# Altium PCB AIMLAB_TESTSTATION_ADC_V1.PcbDoc (part 1 of 4)
Units mm, origin at the board's own origin, x right, y up, seen from the top; angles counter-clockwise.
Board outline 175.7 x 83.5 mm, 6 copper layers (Top Layer, MidLayer1, MidLayer2, MidLayer3, MidLayer4, Bottom Layer), stack 1.507 mm thick; 326 components, 348 nets, 1330 pads, 153 vias.
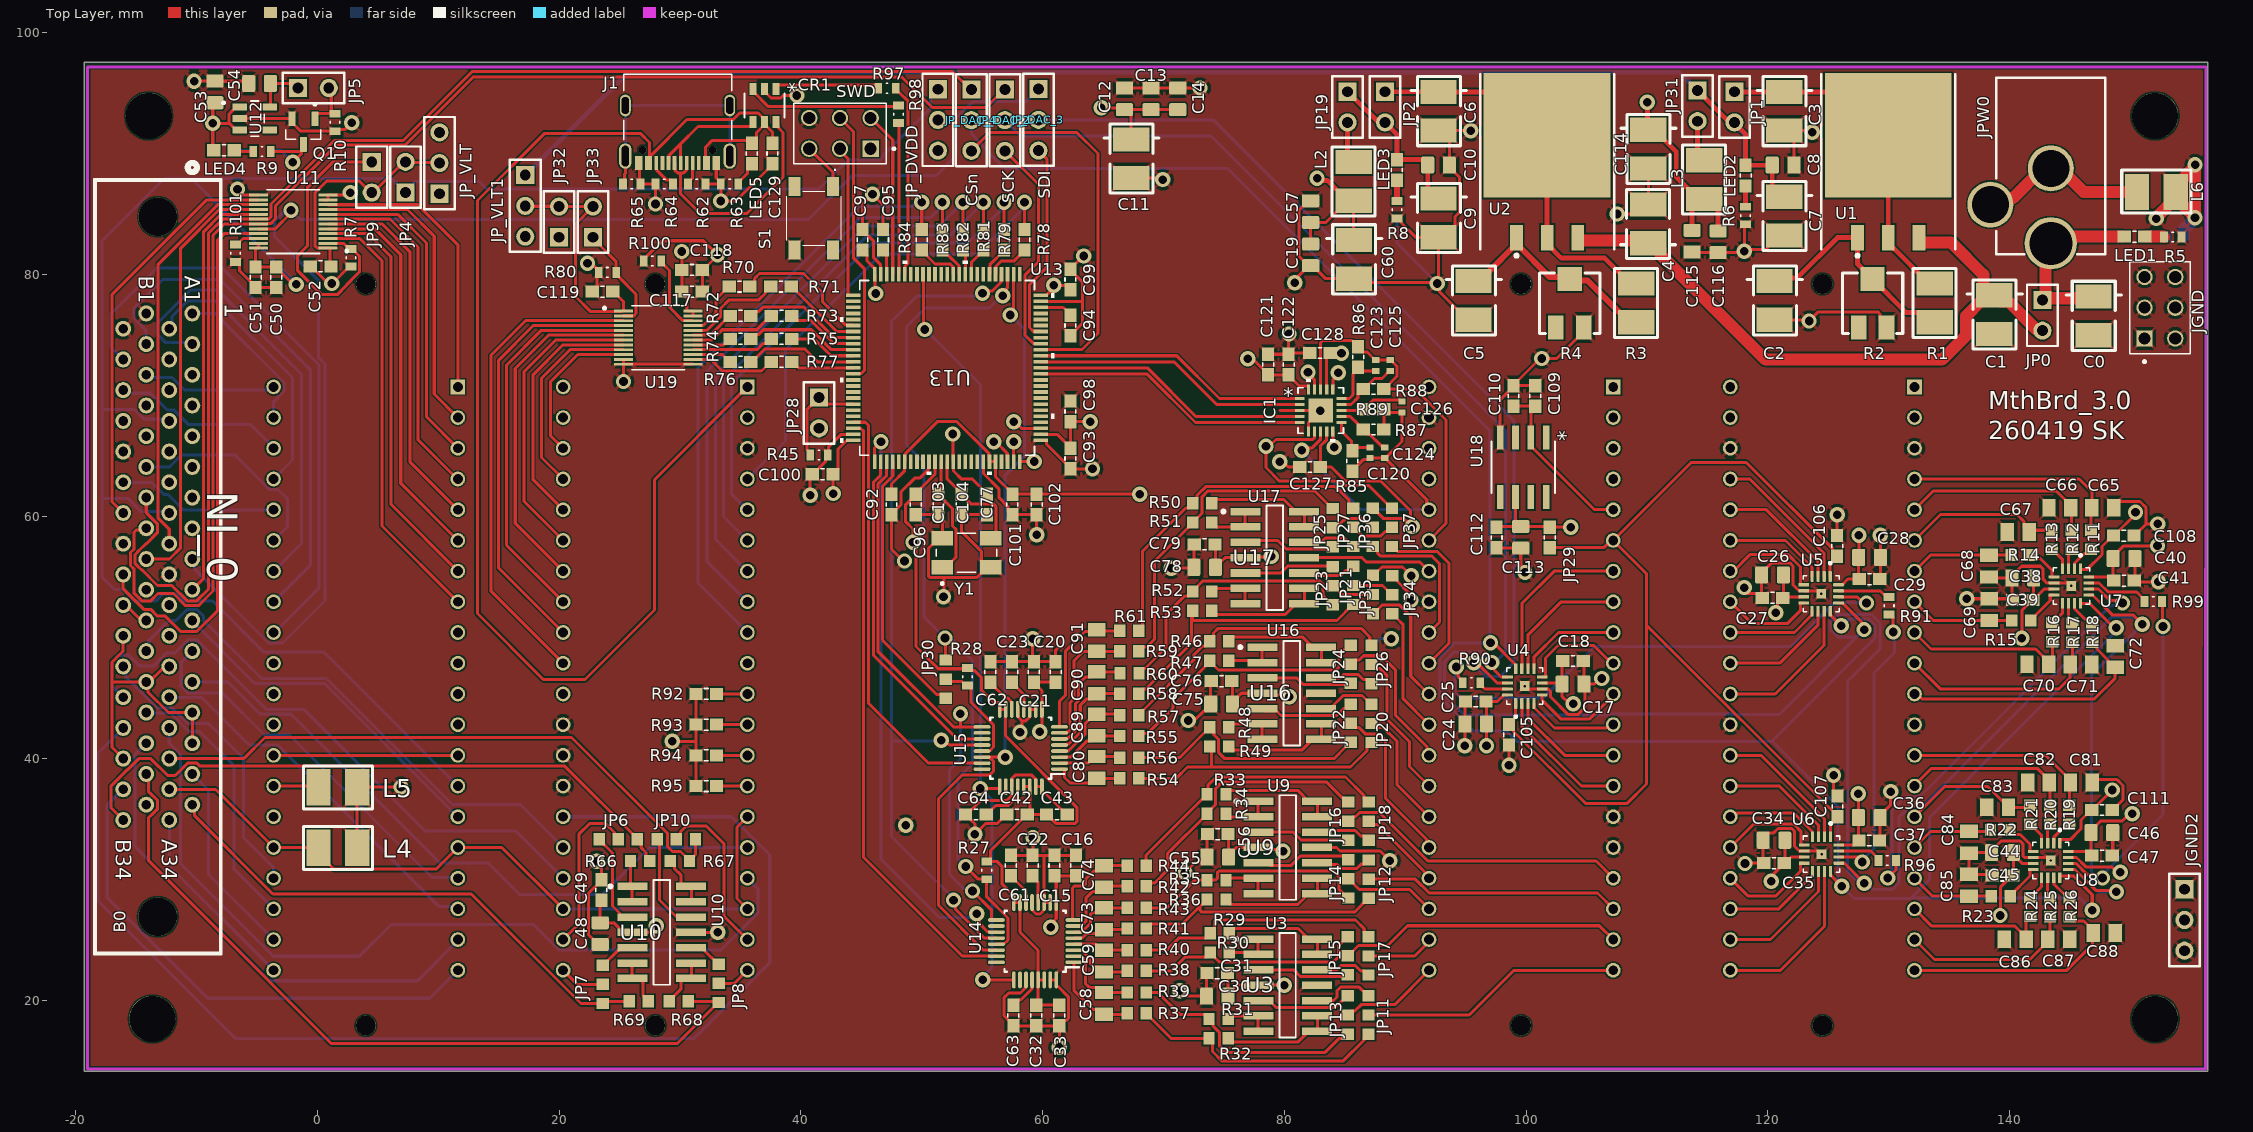
[diagram p0: Top Layer view]
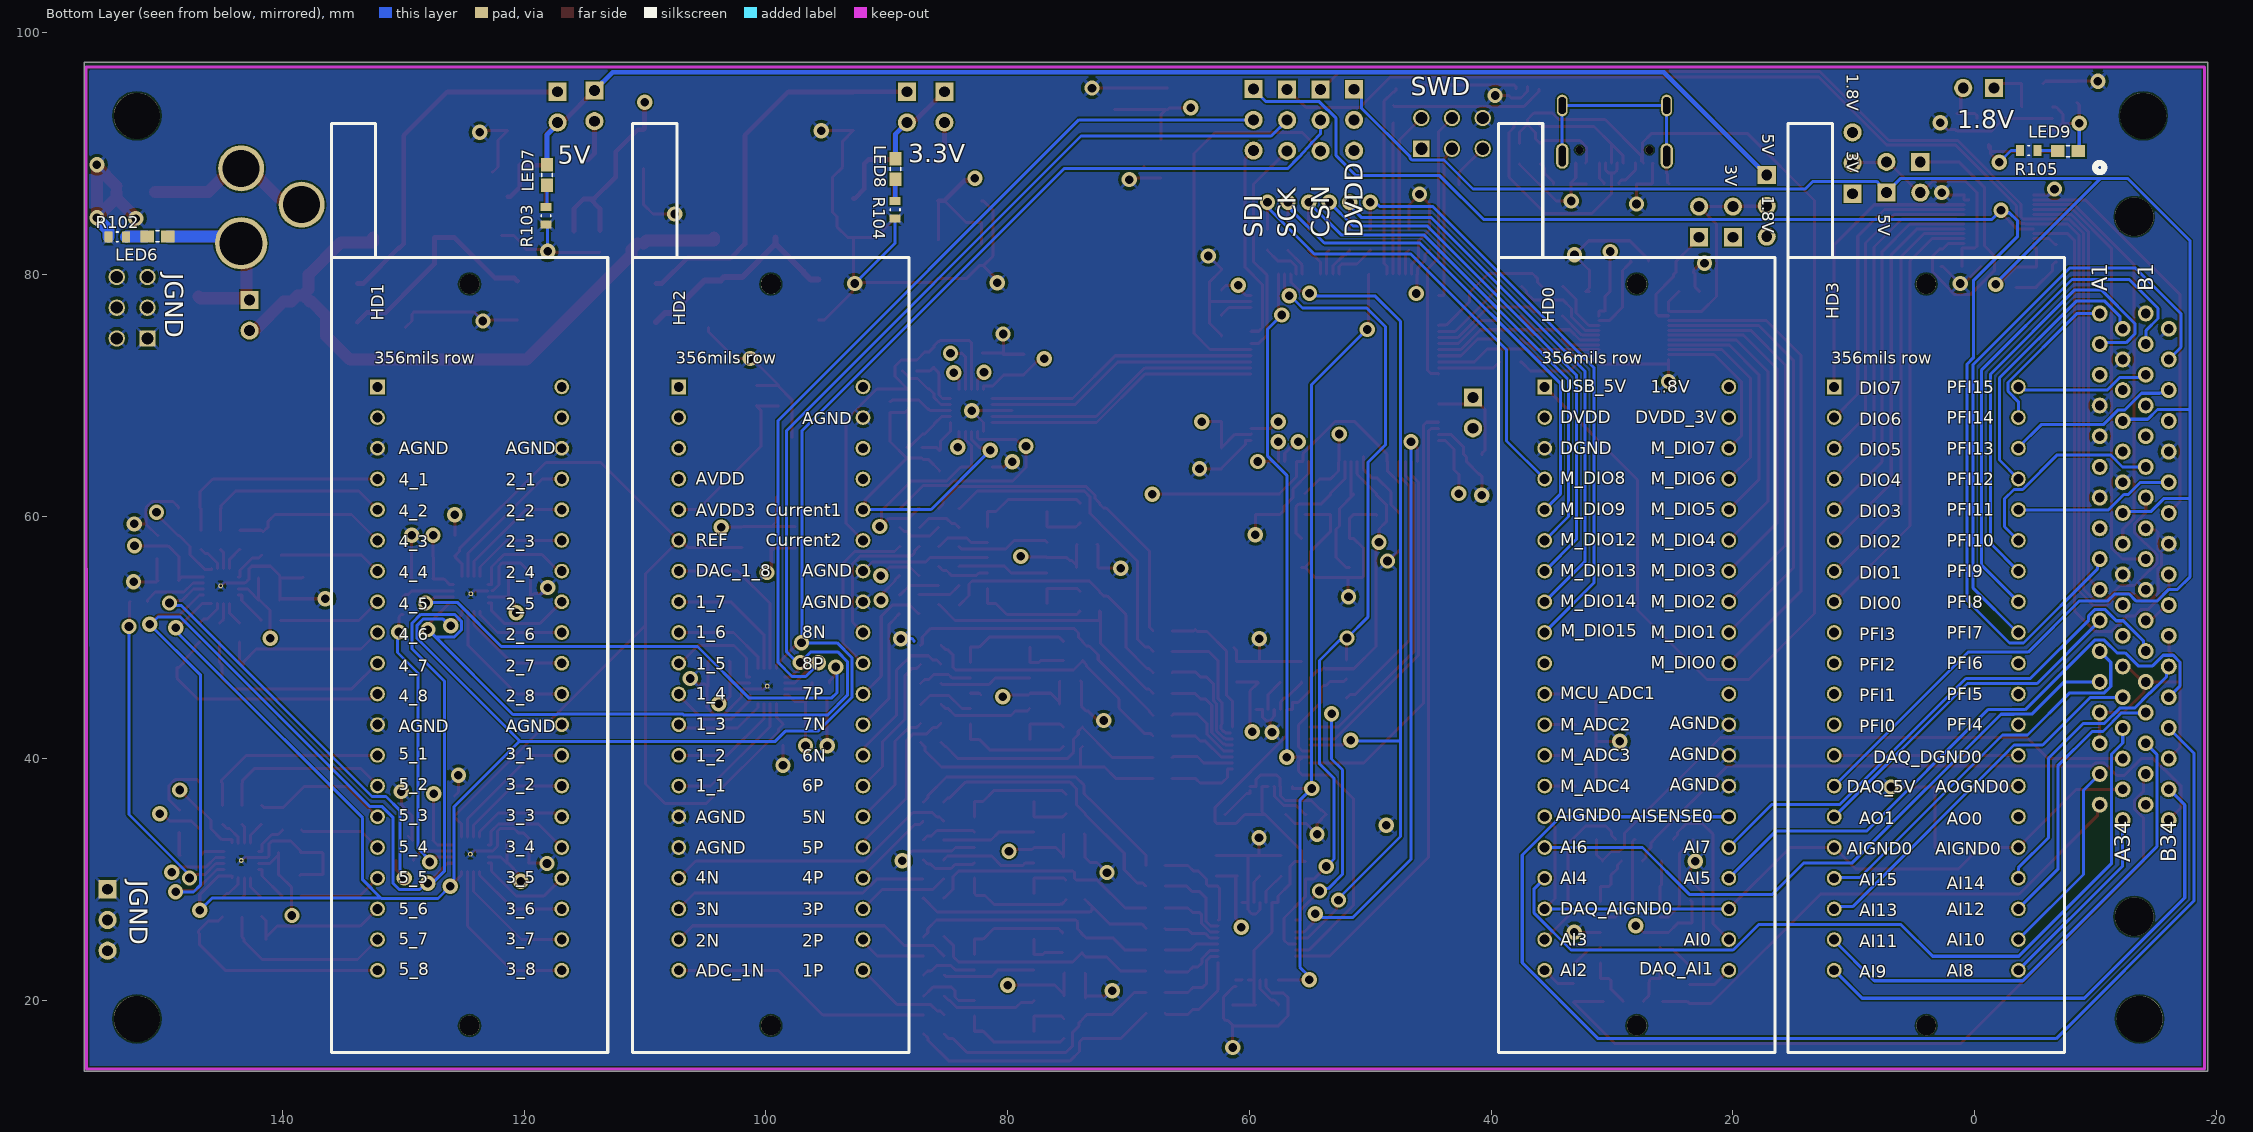
[diagram p1: Bottom Layer view, seen from below]
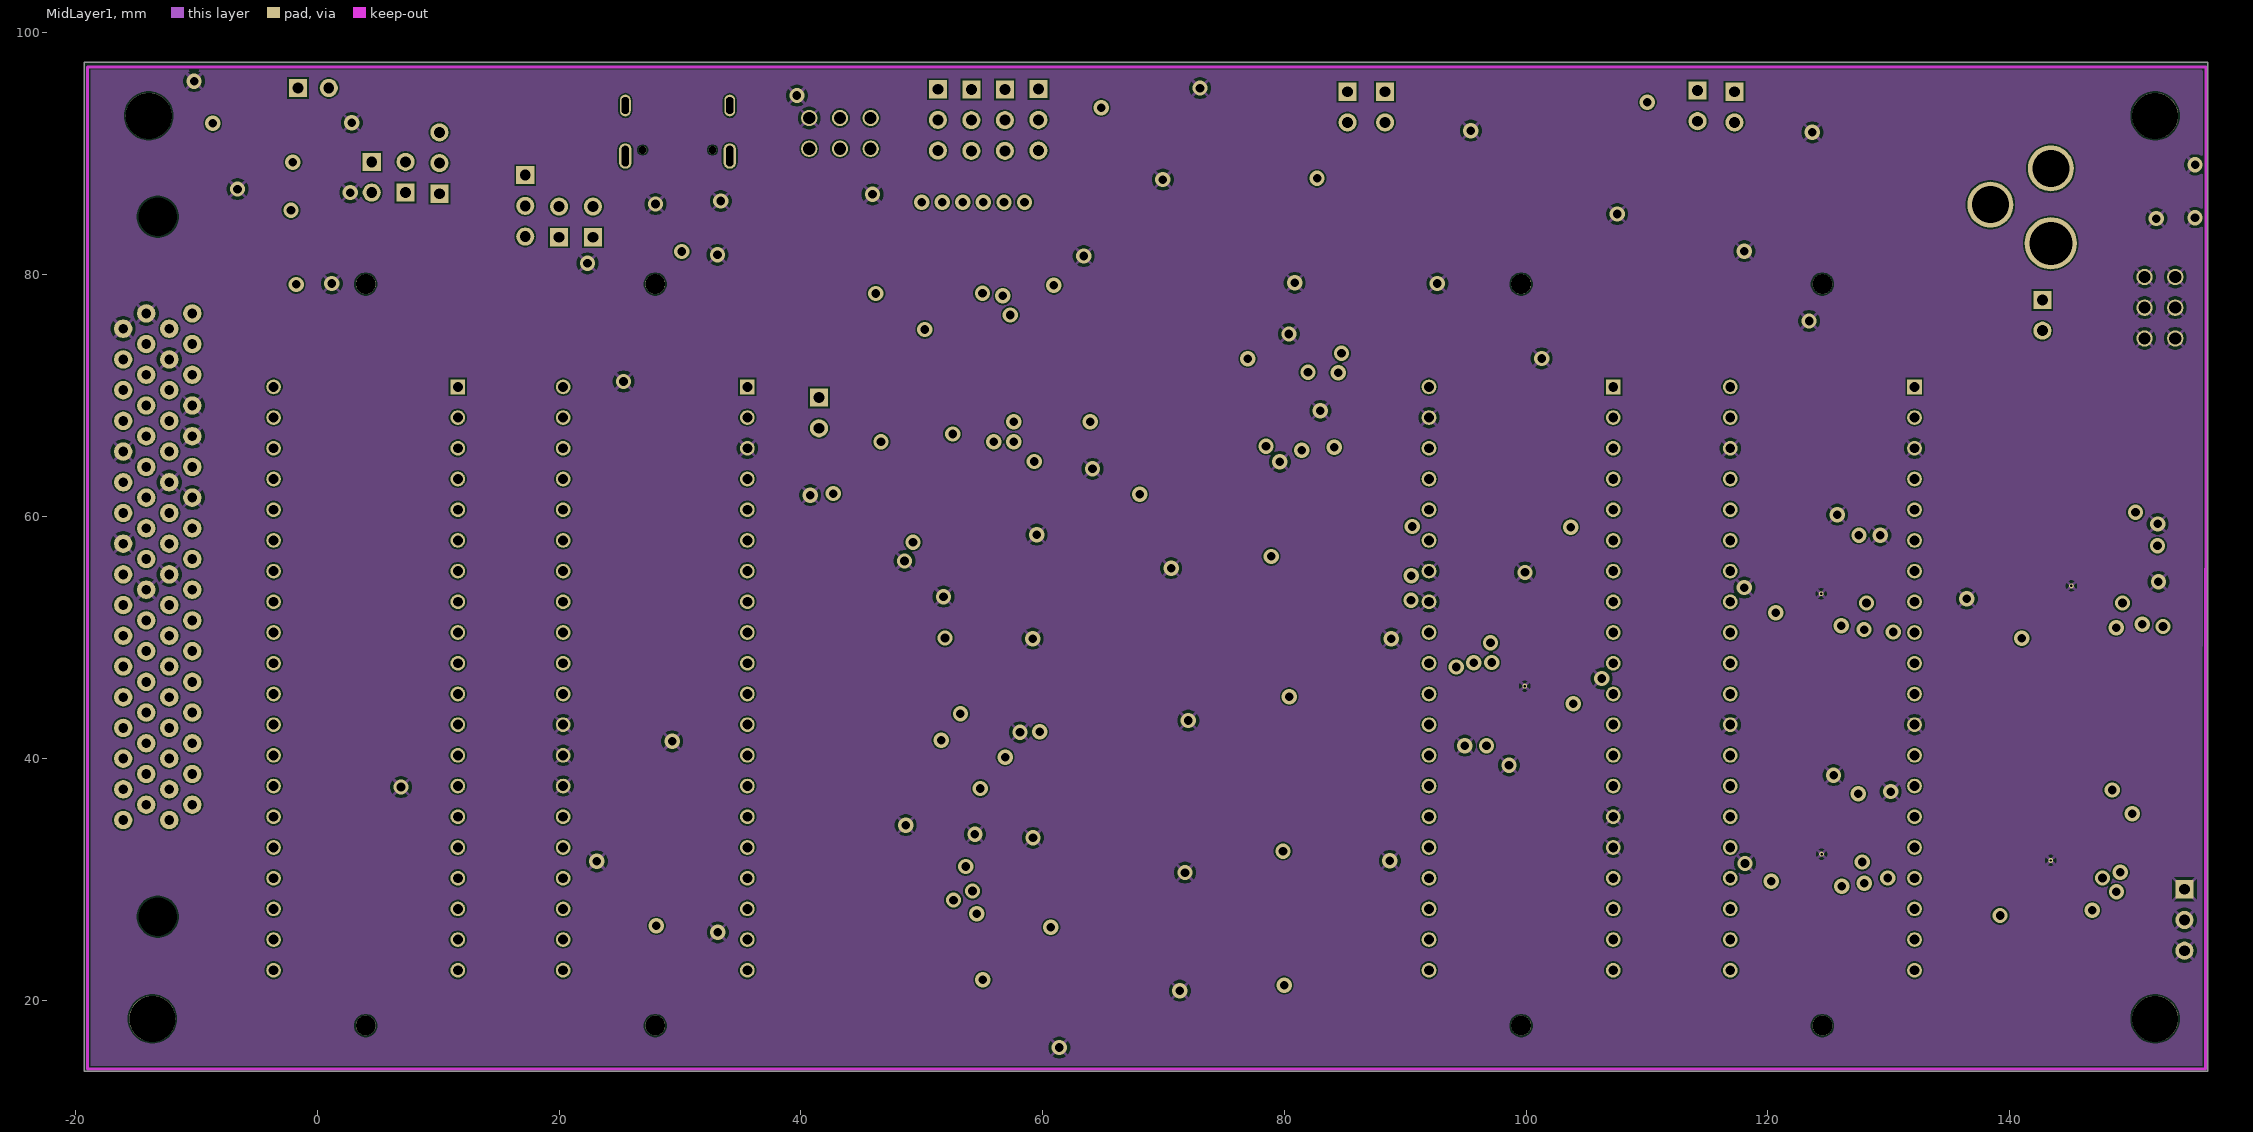
[diagram p2: MidLayer1]
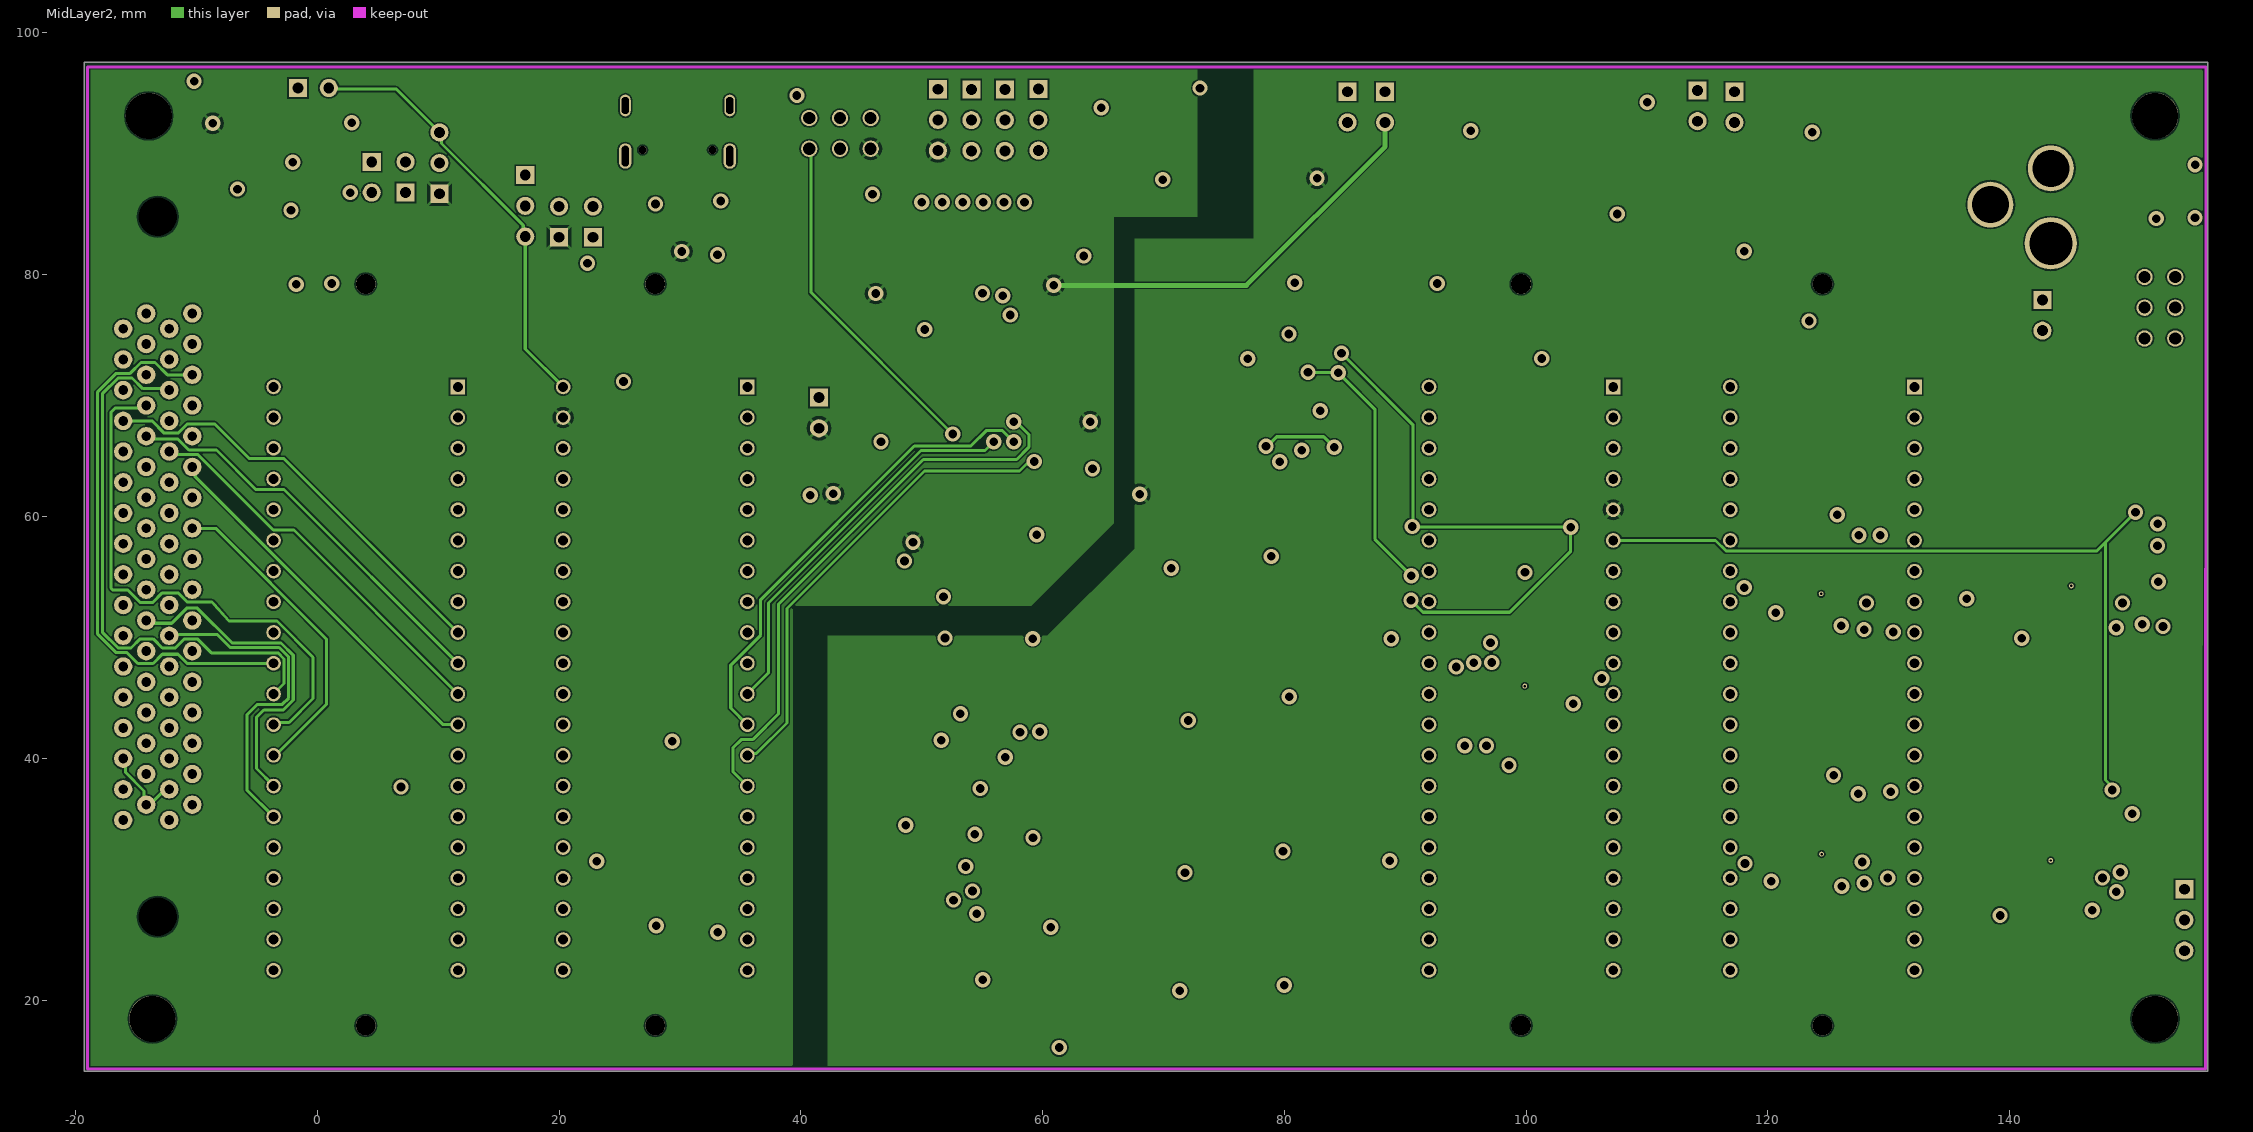
[diagram p3: MidLayer2]
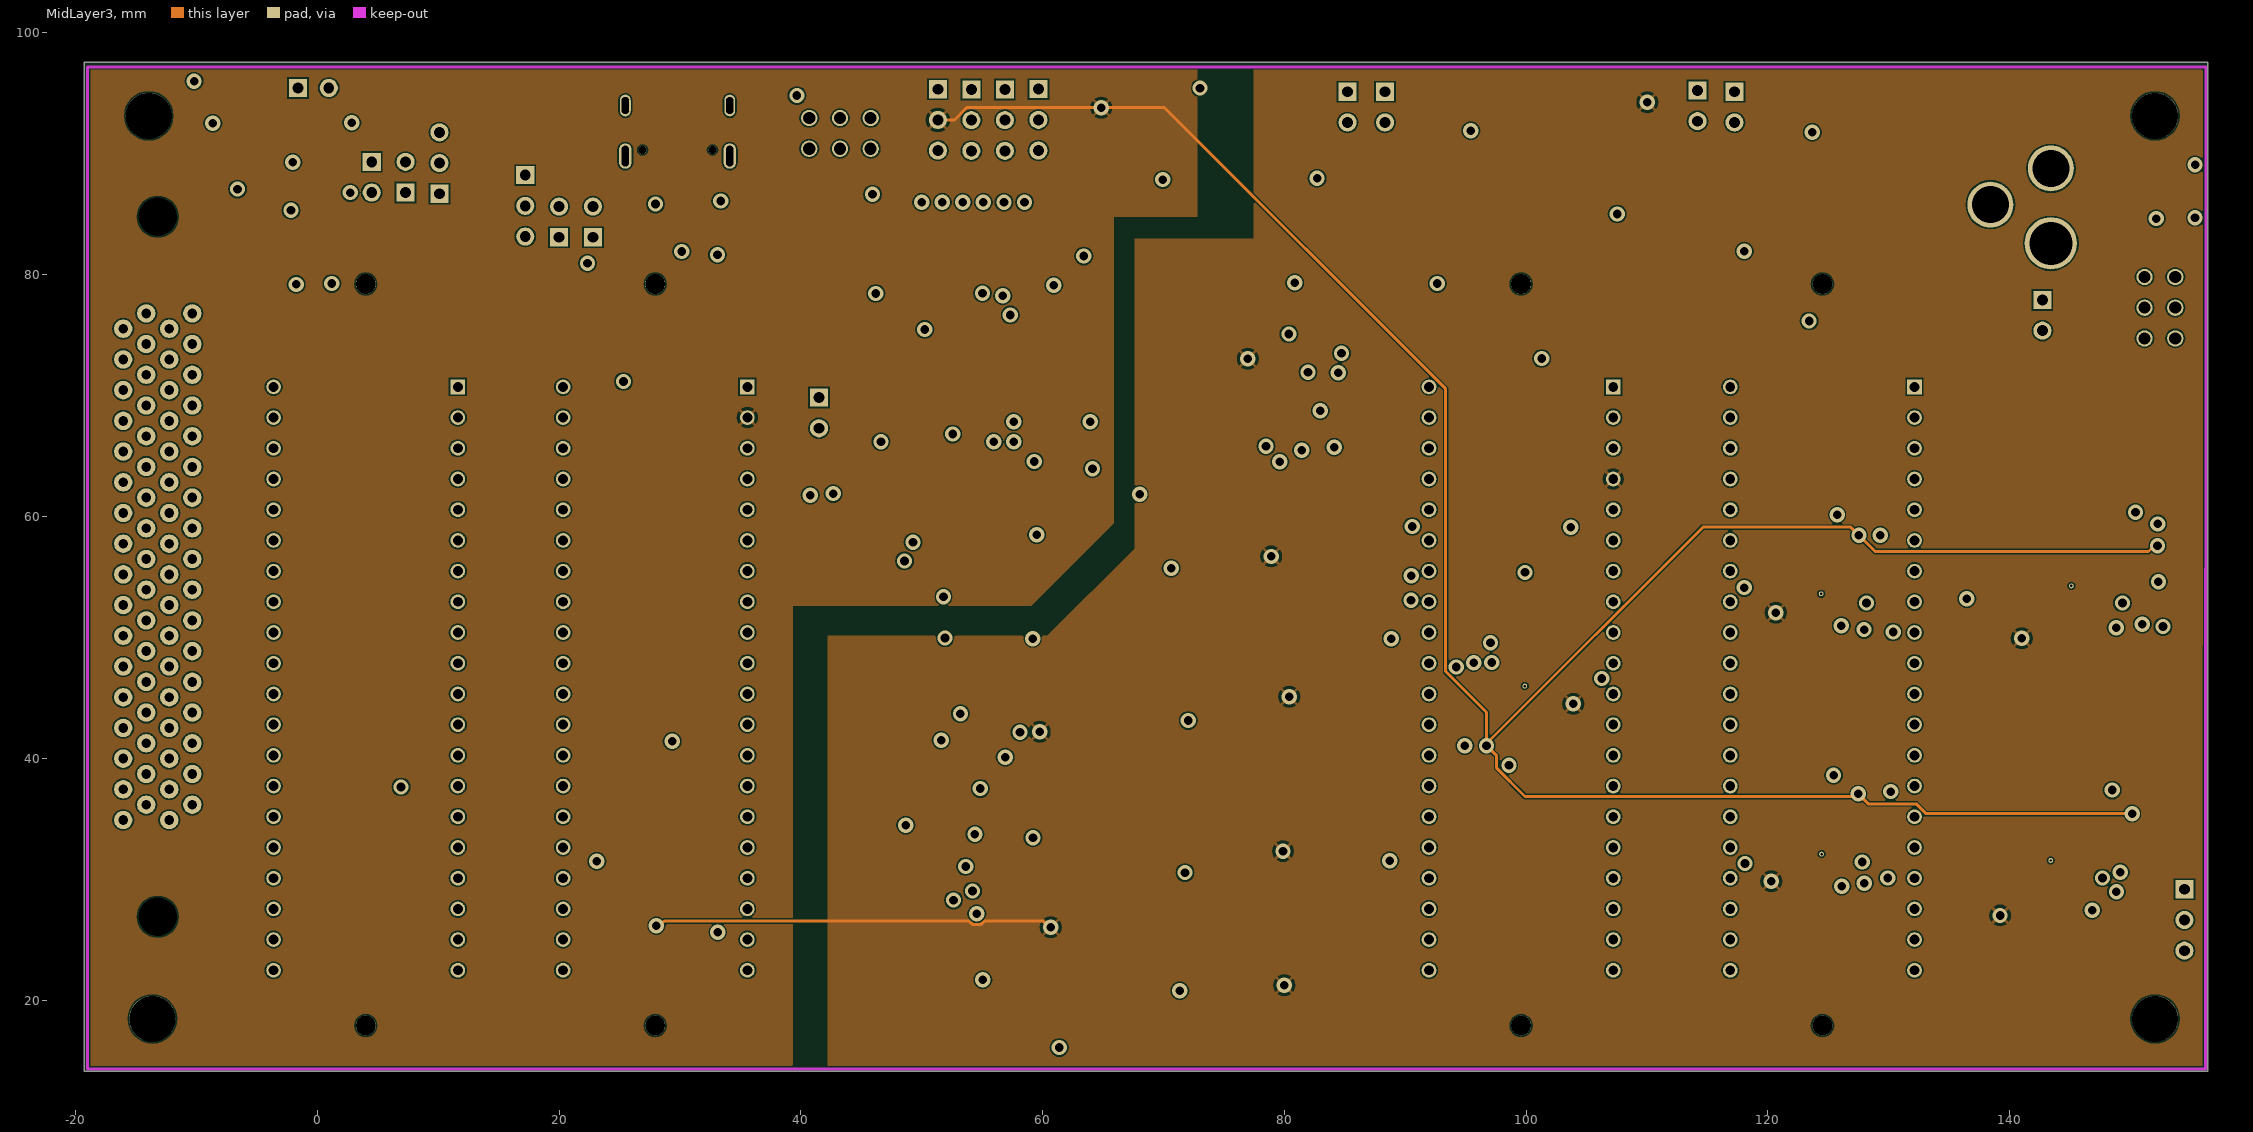
[diagram p4: MidLayer3]
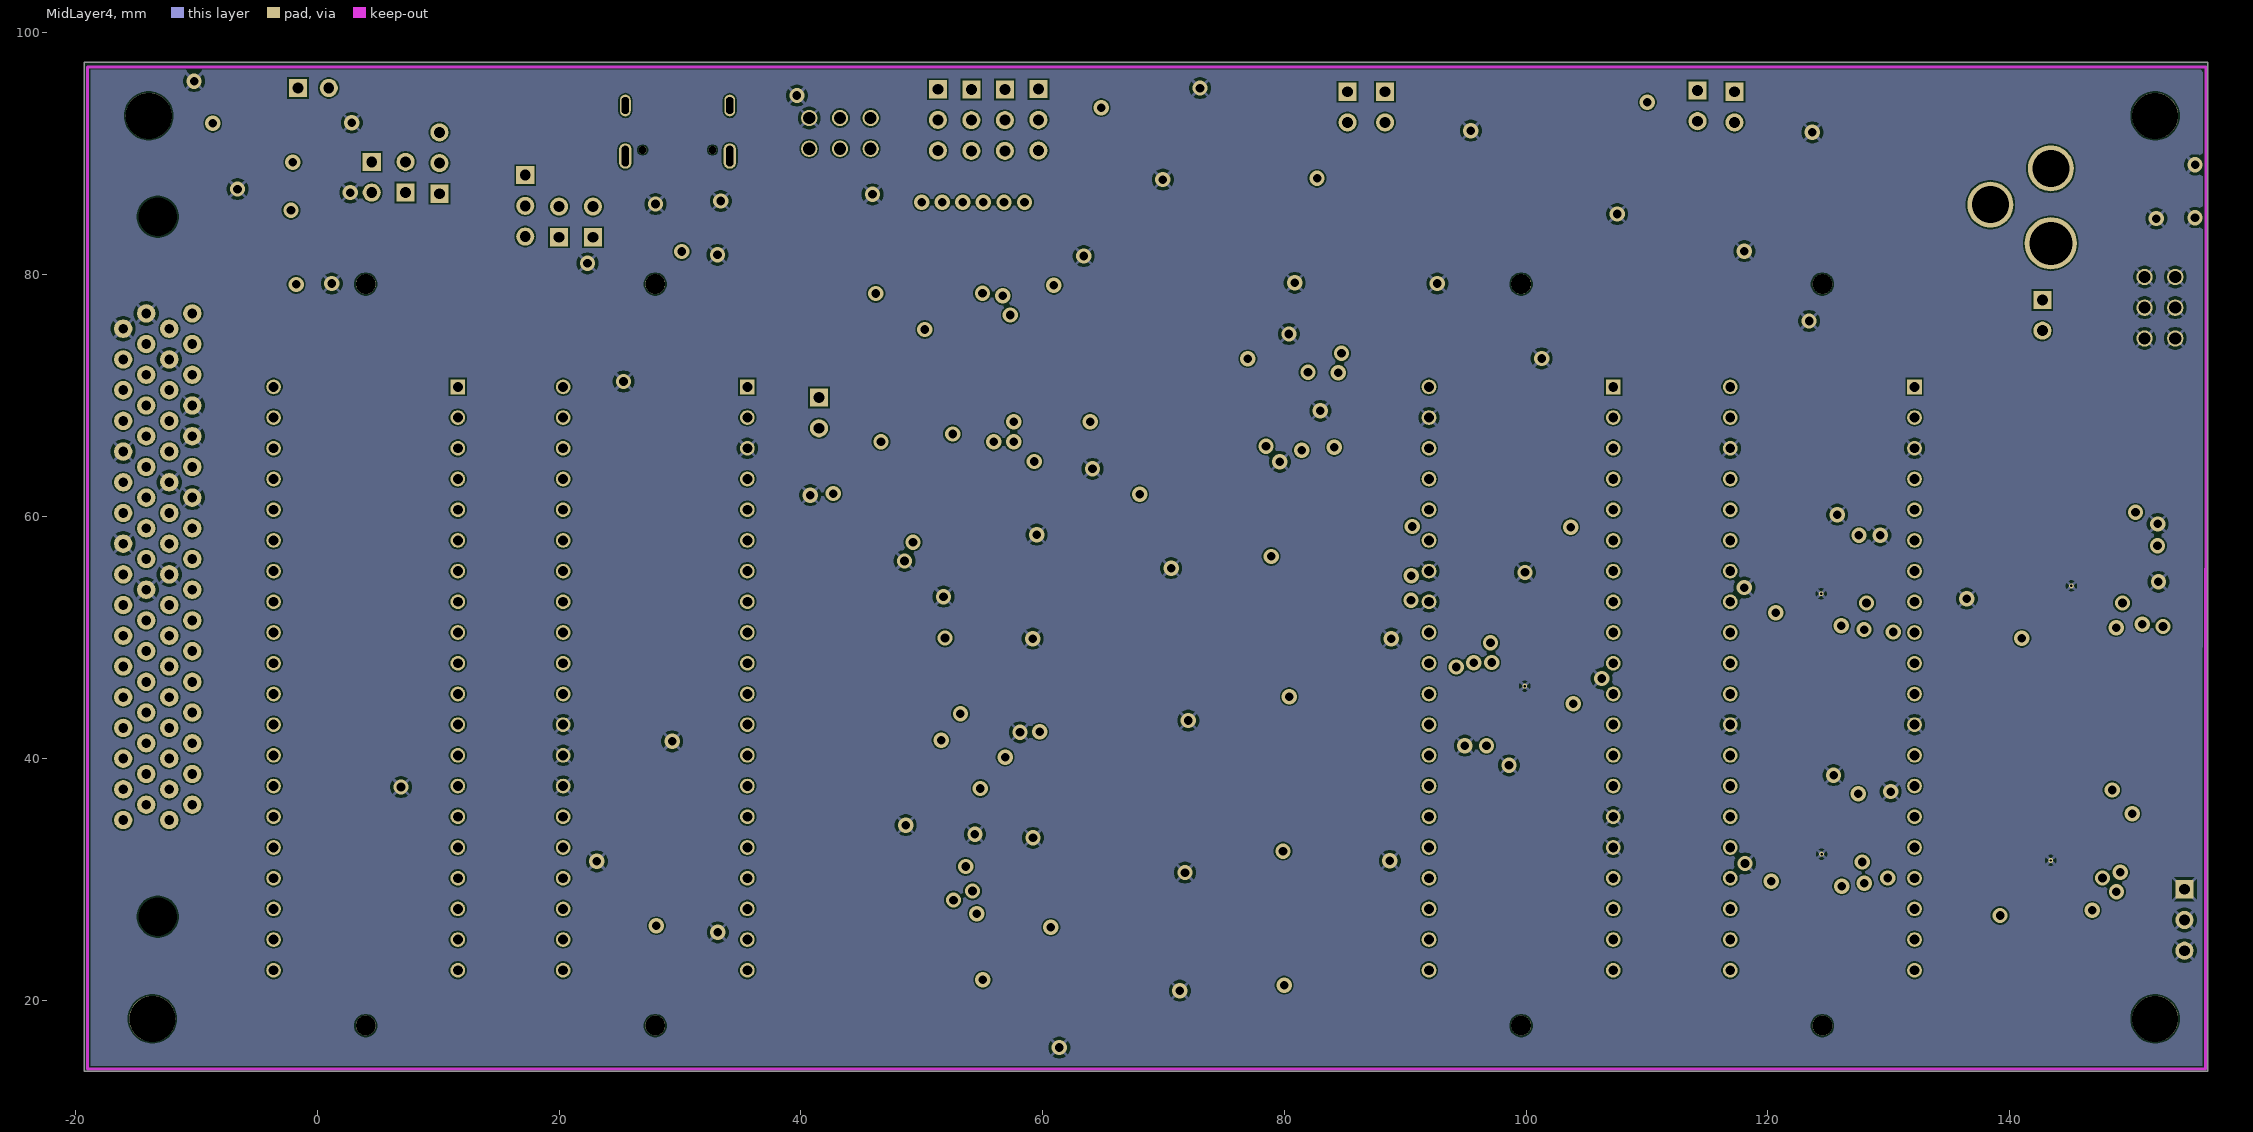
[diagram p5: MidLayer4]

## Layer stack, top to bottom
Top Solder: solder mask 0.0102, Solder Resist, Dk 3.5
Top Layer: signal copper 0.0432
Dielectric1: prepreg 0.1107, FR-4, Dk 4.8
MidLayer1: signal copper 0.0175
Dielectric2: core 0.1016, FR-4, Dk 4.8
MidLayer2: signal copper 0.0175
Dielectric 1: prepreg 0.9256, FR-4, Dk 4.1
MidLayer3: signal copper 0.0175
Dielectric 2: prepreg 0.1016, PP-006, Dk 4.1
MidLayer4: signal copper 0.0175
Dielectric3: prepreg 0.1107, FR-4, Dk 4.8
Bottom Layer: signal copper 0.0432
Bottom Solder: solder mask 0.0102, Solder Resist, Dk 3.5

## Board outline
-19.3,14.1 156.4,14.1 156.4,97.6 -19.3,97.6

## Design rules (kind name [scope] priority, off if disabled: settings)
Clearance [All] p1: gap=0.127 ignorepadtopadclearanceinfootprint=TRUE
ComponentClearance [All] p1: gap=2 collisioncheckmode=3 verticalgap=0.254 showdistances=FALSE
FabricationTestPointUsage TestPointUsage [All] p1: valid=0 allowmultiple=FALSE
FabricationTestpoint Testpoint [All] p1: side=3 testpointundercomponent=TRUE minsize=1.016 maxsize=2.54 preferedsize=1.524 minholesize=0 maxholesize=1.016 preferedholesize=0.813 testpointgrid=0.025 allowsidetop=TRUE allowsidebottom=TRUE usegrid=TRUE gridtolerance=0
FanoutControl Fanout_Small [All] p1 off: bgadir=Out bgaviamode=Centered fanoutstyle=Auto fanoutdirection=Alternating viagrid=0.025 // Protel DXP Scope 1 Expression Was: (CompPinCount < 5)   Fanout_Small (Default Rule)
FanoutControl Fanout_Default [All] p2: bgadir=Out bgaviamode=Centered fanoutstyle=Auto fanoutdirection=Alternating viagrid=0.025 // Fanout_Default (Default Rule)
FanoutControl Fanout_SOIC [All] p3: bgadir=Out bgaviamode=Centered fanoutstyle=Auto fanoutdirection=Alternating viagrid=0.025 // Protel DXP Scope 1 Expression Was: IsSOIC   Fanout_SOIC (Default Rule)
FanoutControl Fanout_BGA [All] p4 off: bgadir=Out bgaviamode=Centered fanoutstyle=Auto fanoutdirection=Alternating viagrid=0.025 // Protel DXP Scope 1 Expression Was: IsBGA   Fanout_BGA (Default Rule)
FanoutControl Fanout_LCC [All] p5 off: bgadir=Out bgaviamode=Centered fanoutstyle=Auto fanoutdirection=Alternating viagrid=0.025 // Protel DXP Scope 1 Expression Was: IsLCC   Fanout_LCC (Default Rule)
HoleSize [All] p1: absolutevalues=TRUE maxlimit=5.08 minlimit=0.025 maxpercent=80.000 minpercent=20.000
PolygonConnect [All] p1: connectstyle=Relief reliefconductorwidth=0.254 reliefentries=4 polygonreliefangle="45 Angle" airgapwidth=0.254
RoutingCorners [All] p1: cornerstyle=Round minsetback=2.54 maxsetback=2.54
RoutingLayers [All] p1: top layer_v5=TRUE mid layer 1_v5=FALSE mid layer 2_v5=TRUE mid layer 3_v5=TRUE mid layer 4_v5=FALSE bottom layer_v5=TRUE
RoutingVias [All] p1: holewidth=0.711 width=1.27 viastyle="Through Hole" minholewidth=0.254 minwidth=0.457 maxholewidth=0.711 maxwidth=1.27
SolderMaskExpansion [All] p1: expansion=0.102 istentingtop=FALSE
SupplyNets "Schematic Supply Nets_6" [InNet('DVDD_5V')] p1: voltage=0.000
SupplyNets "Schematic Supply Nets_5" [InNet('DVDD_3V')] p2: voltage=0.000
SupplyNets "Schematic Supply Nets_4" [InNet('DVDD')] p3: voltage=0.000
SupplyNets "Schematic Supply Nets_3" [InNet('AVDD3')] p4: voltage=0.000
SupplyNets "Schematic Supply Nets_1" [InNet('AVDD')] p5: voltage=0.000
SupplyNets "Schematic Supply Nets" [InNet('AGND')] p6: voltage=0.000
Width Width_0 [All] p1 off: maxlimit=1714.802 minlimit=0.127 preferedwidth=1.016 midlayer3_minwidth=0.254 midlayer4_minwidth=0.254 minimp=50.000000 maximp=50.000000 favimp=50.000000
Width Width_2 [All] p2: maxlimit=2.54 minlimit=0.127 preferedwidth=0.254 midlayer3_minwidth=0.25 midlayer4_minwidth=0.25 minimp=50.000000 maximp=50.000000 favimp=50.000000
Width Width_1 [All] p3: maxlimit=2.54 minlimit=0.127 preferedwidth=0.508 midlayer3_minwidth=0.25 midlayer4_minwidth=0.25 minimp=50.000000 maximp=50.000000 favimp=50.000000
19 further rules are at their usual default settings.

## Classes and differential pairs
polygon class AEXTRATOP: NONET_L01_P012

## Components (designator, comment, footprint, x,y, rotation, side; value= is the part's Value field where it differs from the comment)
B0 "2-174339-5" CONN68_5174339_TEC -10.342,76.805 r270 top
C0 "22u" PolarizedCap 145.425,74 r0 top value=22uF
C1 "10u" PolarizedCap 137.225,74.1 r0 top value=10uF
C2 "10u" PolarizedCap 119.05,75.275 r0 top value=10uF
C3 "10u" PolarizedCap 119.85,90.925 r0 top value=10uF
C4 "10u" PolarizedCap 111.6,86.8 r180 top value=10uF
C5 "10u" PolarizedCap 94.15,75.275 r0 top value=10uF
C6 "10u" PolarizedCap 91.25,90.925 r0 top value=10uF
C7 "10u" PolarizedCap 119.85,82.25 r0 top value=1uF
C8 "1uF" CAPC2012X140N 121.25,89.075 r0 top value=100pF
C9 "10u" PolarizedCap 91.25,82.1 r0 top value=1uF
C10 "1uF" CAPC2012X140N 92.75,89.075 r180 top value=100pF
C11 "10u" PolarizedCap 65.825,87 r0 top value=1uF
C12 "0.1uF" CAPC2012X140N 66.775,94.55 r90 top value=100pF
C13 "0.1uF" CAPC2012X140N 68.975,94.55 r90 top value=100pF
C14 "0.1uF" CAPC2012X140N 71.175,94.55 r90 top value=100pF
C15 "1uF" CAPC1608X90 60.975,31.125 r270 top
C16 "0.1uF" CAPC1608X90 62.775,31.125 r270 top
C17 "10uF" CAPC2012X140N 103.875,46.15 r0 top
C18 "0.1uF" CAPC1608X90 103.875,48.05 r0 top
C19 "1uF" CAPC2012X140N 82.175,81.645 r270 top value=100pF
C20 "1uF" CAPC1608X90 61.075,47.15 r270 top
C21 "0.1uF" CAPC1608X90 59.275,47.15 r270 top
C22 "1uF" CAPC1608X90 59.175,31.125 r90 top
C23 "1uF" CAPC1608X90 57.475,47.15 r90 top
C24 "10uF" CAPC2012X140N 95.825,42.85 r0 top
C25 "0.1uF" CAPC1608X90 95.825,44.7 r0 top
C26 "10uF" CAPC2012X140N 120.375,55.175 r180 top
C27 "0.1uF" CAPC1608X90 120.375,53.275 r180 top
C28 "10uF" CAPC2012X140N 128.4,56.625 r180 top
C29 "0.1uF" CAPC1608X90 128.4,54.825 r180 top
C30 "10uF" CAPC2012X140N 74.45,20.333 r180 top
C31 "0.1uF" CAPC1608X90 74.45,22.233 r180 top
C32 "1uF" CAPC1608X90 59.475,18.725 r90 top
C33 "0.1uF" CAPC1608X90 61.375,18.725 r90 top
C34 "10uF" CAPC2012X140N 120.5,33.225 r180 top
C35 "0.1uF" CAPC1608X90 120.5,31.325 r180 top
C36 "10uF" CAPC2012X140N 128.375,35.1 r180 top
C37 "0.1uF" CAPC1608X90 128.375,33.2 r180 top
C38 "10uF" CAPC2012X140N 141.075,54.925 r180 top
C39 "0.1uF" CAPC1608X90 141.075,53.1 r180 top
C40 "10uF" CAPC2012X140N 149.45,56.525 r180 top
C41 "0.1uF" CAPC1608X90 149.45,54.7 r180 top
C42 "1uF" CAPC1608X90 57.875,35.35 r0 top
C43 "0.1uF" CAPC1608X90 61.175,35.35 r180 top
C44 "10uF" CAPC2012X140N 139.4,32.2 r180 top
C45 "0.1uF" CAPC1608X90 139.4,30.3 r180 top
C46 "10uF" CAPC2012X140N 147.625,33.85 r180 top
C47 "0.1uF" CAPC1608X90 147.625,31.95 r180 top
C48 "10uF" CAPC2012X140N 23.4,25.5 r270 top
C49 "0.1uF" CAPC1608X90 23.5,29.1 r90 top
C50 "0.1uF" CAPC1608X90 -3.4,79.8 r90 top
C51 "1uF" CAPC1608X90 -5.1,79.8 r90 top
C52 "0.1uF" CAPC1608X90 0.275,80.7 r0 top
C53 "1uF" CAPC2012X140N -8.475,95.125 r270 top
C54 "1uF" CAPC2012X140N -4.775,95.825 r0 top
C55 "10uF" CAPC2012X140N 74.481,31.824 r180 top
C56 "0.1uF" CAPC1608X90 74.481,33.724 r180 top
C57 "0.1uF" CAPC2012X140N 82.175,85.225 r90 top value=100pF
C58 "1nF" CAPC2012X145N 65.075,19.725 r270 top
C59 "1nF" CAPC2012X145N 65.075,23.225 r270 top
C60 "10u" PolarizedCap 84.25,78.675 r0 top value=1uF
C61 "1uF" CAPC1608X90 57.375,31.125 r270 top
C62 "1uF" CAPC1608X90 55.675,47.15 r270 top
C63 "1uF" CAPC1608X90 57.575,18.725 r90 top
C64 "1uF" CAPC1608X90 54.475,35.35 r0 top
C65 "100uF" CAPC2012X145N 147.7,60.725 r180 top
C66 "100uF" CAPC2012X145N 144.15,60.725 r0 top
C67 "100uF" CAPC2012X145N 140.7,58.725 r0 top
C68 "100uF" CAPC2012X145N 138.275,55.9 r90 top
C69 "100uF" CAPC2012X145N 138.3,52.3 r270 top
C70 "100uF" CAPC2012X145N 142.325,47.775 r0 top
C71 "100uF" CAPC2012X145N 145.9,47.75 r180 top
C72 "100uF" CAPC2012X145N 148.725,48.425 r270 top
C73 "1nF" CAPC2012X145N 65.075,26.725 r270 top
C74 "1nF" CAPC2012X145N 65.075,30.225 r270 top
C75 "10uF" CAPC2012X140N 74.8,44.483 r180 top
C76 "0.1uF" CAPC1608X90 74.8,46.383 r180 top
C77 "0.1uF" CAPC1608X90 55.4,61 r90 top
C78 "10uF" CAPC2012X140N 73.4,55.8 r180 top
C79 "0.1uF" CAPC1608X90 73.4,57.7 r180 top
C80 "1nF" CAPC2012X145N 64.475,39.25 r270 top
C81 "100uF" CAPC2012X145N 145.925,38 r180 top
C82 "100uF" CAPC2012X145N 142.375,38 r0 top
C83 "100uF" CAPC2012X145N 139,35.95 r0 top
C84 "100uF" CAPC2012X145N 136.625,33.05 r90 top
C85 "100uF" CAPC2012X145N 136.625,29.5 r270 top
C86 "100uF" CAPC2012X145N 140.45,25.025 r0 top
C87 "100uF" CAPC2012X145N 144.05,25.025 r180 top
C88 "100uF" CAPC2012X145N 147.825,25.55 r180 top
C89 "1nF" CAPC2012X145N 64.475,42.75 r270 top
C90 "1nF" CAPC2012X145N 64.475,46.25 r270 top
C91 "1nF" CAPC2012X145N 64.475,49.75 r270 top
C92 "0.1uF" CAPC1608X90 47.5,61 r270 top
C93 "4.7uF" CAPC1608X90 62.3,64.8 r90 top
C94 "2.2uF" CAPC1608X90 62.3,75.8 r270 top
C95 "2.2uF" CAPC1608X90 46.8,82.9 r90 top
C96 "0.1uF" CAPC1608X90 49.5,61 r90 top
C97 "0.1uF" CAPC1608X90 45.1,82.9 r270 top
C98 "0.1uF" CAPC1608X90 62.3,68.7 r270 top
C99 "0.1uF" CAPC1608X90 62.3,79.6 r270 top
C100 "0.1uF" CAPC1608X90 41.8,63.5 r0 top
C101 "0.1uF" CAPC1608X90 57.5,61 r90 top
C102 "1uF" CAPC1608X90 59.5,61 r90 top
C103 "27pF" CAPC1608X90 51.4,61 r90 top
C104 "27pF" CAPC1608X90 53.3,61 r90 top
C105 "1uF" CAPC1608X90 98.575,41.95 r270 top
C106 "1uF" CAPC1608X90 125.725,57.575 r90 top
C107 "1uF" CAPC1608X90 125.75,36.025 r90 top
C108 "1uF" CAPC1608X90 149.425,58.425 r0 top
C109 "1uF" CAPC1608X90 100.75,69.975 r270 top
C110 "0.1uF" CAPC1608X90 98.95,69.975 r270 top
C111 "1uF" CAPC1608X90 147.625,35.725 r0 top
C112 "1uF" CAPC1608X90 97.55,58.275 r90 top
C113 "10uF" CAPC2012X140N 99.55,58.275 r90 top
C114 "10u" PolarizedCap 108.6,87.8 r0 top value=1uF
C115 "1uF" CAPC2012X140N 113.725,82.775 r270 top value=100pF
C116 "0.1uF" CAPC2012X140N 115.875,82.725 r270 top value=100pF
C117 "0.1uF" CAPC1608X90 31,78.6 r180 top
C118 "1uF" CAPC1608X90 31,80.4 r180 top
C119 "0.1uF" CAPC1608X90 23.6,78.6 r0 top
C120 "CBR04C220F5GAC" CAPC1005X55N 87.075,65.275 r270 top
C121 "0.1uF" CAPC1608X90 78.65,72.575 r90 top
C122 "1uF" CAPC1608X90 80.35,72.575 r90 top
C123 "CBR04C220F5GAC" CAPC1005X55N 87.55,72.5 r90 top
C124 "CBR04C220F5GAC" CAPC1005X55N 88.3,65.275 r270 top
C125 "CBR04C220F5GAC" CAPC1005X55N 88.75,72.5 r90 top
C126 "CBR04C220F5GAC" CAPC1005X55N 89.725,69.05 r270 top
C127 "1uF" CAPC1608X90 82.125,64.1 r180 top
C128 "1uF" CAPC1608X90 82.95,73.525 r0 top
C129 "100nF" CAPC1608X90 37.65,90.025 r90 top
CR1 "USBLC6-2SC6" SOT23-6L_STM 37,94 r270 top
HD0 "Header 20X2" ZIF40 35.575,70.725 r180 bottom locked
HD1 "Header 20X2" ZIF40 132.125,70.725 r180 bottom locked
HD2 "Header 20X2" ZIF40 107.2,70.725 r180 bottom locked
HD3 "Header 20X2" ZIF40 11.625,70.725 r180 bottom locked
IC1 "OPA3S328RGRR" VQFN20_3P5X3P5_TEX 83,68.773 r0 top
J1 "12402012E212A" AMPHENOL_12402012E212A 29.8,94 r180 top
JGND "826632-3" TE_826632-3 151.15,74.735 r90 top
JGND2 "VA" HDR1X3 154.45,29.165 r270 top
JP0 "JP" HDR1X2 142.7,77.915 r270 top
JP1 "JP" HDR1X2 117.225,95.14 r270 top
JP2 "JP" HDR1X2 88.325,95.14 r270 top
JP4 "JP" HDR1X2 7.3,86.8 r90 top
JP5 "JP" HDR1X2 -1.59,95.45 r0 top
JP6 "A" JumperRes 21.824,33.046 r0 top
JP7 "B" JumperRes 23.346,24.376 r270 top
JP8 "C" JumperRes 32.946,24.456 r270 top
JP9 "JP" HDR1X2 4.5,89.34 r270 top
JP10 "D" JumperRes 26.624,33.046 r0 top
JP11 "A" JumperRes 86.696,21.843 r270 top
JP12 "A" JumperRes 86.727,33.08 r270 top
JP13 "B" JumperRes 84.996,21.843 r270 top
JP14 "B" JumperRes 85.027,33.1 r270 top
JP15 "C" JumperRes 85.504,20.591 r90 top
JP16 "C" JumperRes 85.535,31.728 r90 top
JP17 "D" JumperRes 87.204,20.574 r90 top
JP18 "D" JumperRes 87.235,31.728 r90 top
JP19 "JP" HDR1X2 85.225,95.14 r270 top
JP20 "A" JumperRes 86.946,45.959 r270 top
JP21 "A" JumperRes 85.446,57.376 r270 top
JP22 "B" JumperRes 85.246,45.979 r270 top
JP23 "B" JumperRes 83.746,57.356 r270 top
JP24 "C" JumperRes 85.754,44.707 r90 top
JP25 "C" JumperRes 84.254,56.004 r90 top
JP26 "D" JumperRes 87.454,44.687 r90 top
JP27 "D" JumperRes 85.954,56.024 r90 top
JP28 "JP" HDR1X2 41.5,69.84 r270 top
JP29 "JP" CAPC1608X90 101.95,58.275 r270 top
JP30 "D" JumperRes 51.721,49.626 r270 top
JP31 "JP" HDR1X2 114.175,95.24 r270 top
JP32 "JP" HDR1X2 20,83.1 r90 top
JP33 "JP" HDR1X2 22.8,83.1 r90 top
JP34 "D" JumperRes 88.671,56.606 r270 top
JP35 "D" JumperRes 87.071,56.626 r270 top
JP36 "D" JumperRes 87.046,62.176 r270 top
JP37 "D" JumperRes 88.646,62.176 r270 top
JP_DAC_2 "SCK" HDR1X3 56.875,95.33 r270 top
JP_DAC_3 "SDI" HDR1X3 59.65,95.355 r270 top
JP_DAC_4 "CSn" HDR1X3 54.1,95.33 r270 top
JP_DVDD "JP" HDR1X3 51.333,95.347 r270 top
JP_VLT "VA" HDR1X3 10.1,86.7 r90 top
JP_VLT1 "VA" HDR1X3 17.2,88.24 r270 top
JPW0 "" KLD-0202_ 143.4,96.3 r270 top
L2 "Ferrite Chip Beads" Inductor 87.606,90.706 r180 top value=10mH
L3 "Ferrite Chip Beads" Inductor 116.606,90.856 r180 top value=10mH
L4 "Ferrite Chip Beads" Inductor -1.281,34.481 r270 top value=10mH
L5 "Ferrite Chip Beads" Inductor -1.281,39.481 r270 top value=10mH
L6 "Ferrite Chip Beads" Inductor 155.106,84.969 r90 top value=10mH
LED1 "LG L29K-F2J1-24-Z" CAPC1608X90 150.325,83.15 r180 top
LED2 "LG L29K-F2J1-24-Z" CAPC1608X90 118.15,88.2 r90 top
LED3 "LG L29K-F2J1-24-Z" CAPC1608X90 89.3,88.675 r90 top
LED4 "LG L29K-F2J1-24-Z" CAPC1608X90 -7.725,90.3 r180 top
LED5 "LG L29K-F2J1-24-Z" CAPC1608X90 35.95,90.025 r90 top
LED6 "LG L29K-F2J1-24-Z" CAPC1608X90 150.325,83.175 r180 bottom
LED7 "LG L29K-F2J1-24-Z" CAPC1608X90 118.1,88.25 r90 bottom
LED8 "LG L29K-F2J1-24-Z" CAPC1608X90 89.275,88.75 r90 bottom
LED9 "LG L29K-F2J1-24-Z" CAPC1608X90 -7.725,90.225 r180 bottom
Q1 "BSS138LT3G" SOT95P237X111-3N -1.15,91.85 r270 top
R1 "500" Resistor 135.681,80.656 r180 top
R2 "2K" POT4MM-2 128.65,77.65 r90 top value=1K
R3 "500" Resistor 110.981,80.656 r180 top
R4 "2K" POT4MM-2 103.6,77.65 r90 top value=1K
R5 "18K RC0603JR-0718KL" RES_ERA3AEB2491V 153.475,83.125 r180 top
R6 "7.5K RC0603FR-077K5L" RES_ERA3AEB2491V 118.15,84.9 r90 top
R7 "100k RC0603FR-07100KL" RES_ERA3AEB2491V 2.775,81.4 r270 top
R8 "2.5K ERA3AEB2491V" RES_ERA3AEB2491V 89.325,85.375 r90 top
R9 "2.5K ERA3AEB2491V" RES_ERA3AEB2491V -4.575,90.2 r180 top
R10 "100k RC0603FR-07100KL" RES_ERA3AEB2491V 1.475,92.6 r90 top
R11 "220Ohm" RESC1608X50N 146.725,58.075 r90 top
R12 "220Ohm" RESC1608X50N 145.125,58.075 r90 top
R13 "220Ohm" RESC1608X50N 143.5,58.075 r90 top
R14 "220Ohm" RESC1608X50N 140.9,56.825 r180 top
R15 "220Ohm" RESC1608X50N 140.95,51.4 r180 top
R16 "220Ohm" RESC1608X50N 143.525,50.425 r270 top
R17 "220Ohm" RESC1608X50N 145.175,50.4 r270 top
R18 "220Ohm" RESC1608X50N 146.825,50.4 r270 top
R19 "220Ohm" RESC1608X50N 144.925,35.325 r90 top
R20 "220Ohm" RESC1608X50N 143.325,35.325 r90 top
R21 "220Ohm" RESC1608X50N 141.7,35.325 r90 top
R22 "220Ohm" RESC1608X50N 139.2,34.075 r180 top
R23 "220Ohm" RESC1608X50N 139.25,28.6 r180 top
R24 "220Ohm" RESC1608X50N 141.7,27.7 r270 top
R25 "220Ohm" RESC1608X50N 143.325,27.675 r270 top
R26 "220Ohm" RESC1608X50N 144.95,27.675 r270 top
R27 "100k RC0603FR-07100KL" RES_ERA3AEB2491V 55.375,30.725 r90 top
R28 "100k RC0603FR-07100KL" RES_ERA3AEB2491V 53.775,46.75 r90 top
R29 "10Ohm" RESC1608X50N 74.65,25.533 r180 top
R30 "10Ohm" RESC1608X50N 74.65,23.933 r0 top
R31 "10Ohm" RESC1608X50N 74.55,18.433 r0 top
R32 "10Ohm" RESC1608X50N 74.55,16.833 r180 top
R33 "10Ohm" RESC1608X50N 74.381,37.024 r180 top
R34 "10Ohm" RESC1608X50N 74.381,35.424 r0 top
R35 "10Ohm" RESC1608X50N 74.381,29.924 r0 top
R36 "10Ohm" RESC1608X50N 74.381,28.324 r180 top
R37 "100Ohm" RESC1608X50N 67.775,18.925 r180 top
R38 "100Ohm" RESC1608X50N 67.775,22.425 r180 top
R39 "100Ohm" RESC1608X50N 67.775,20.625 r180 top
R40 "100Ohm" RESC1608X50N 67.775,24.125 r180 top
R41 "100Ohm" RESC1608X50N 67.775,25.925 r180 top
R42 "100Ohm" RESC1608X50N 67.775,29.425 r180 top
R43 "100Ohm" RESC1608X50N 67.775,27.625 r180 top
R44 "100Ohm" RESC1608X50N 67.775,31.125 r180 top
R45 "10k" RES_ERA3AEB2491V 41.5,65.1 r0 top
R46 "10Ohm" RESC1608X50N 74.6,49.683 r180 top
R47 "10Ohm" RESC1608X50N 74.6,48.083 r0 top
R48 "10Ohm" RESC1608X50N 74.6,42.583 r0 top
R49 "10Ohm" RESC1608X50N 74.6,40.983 r180 top
R50 "10Ohm" RESC1608X50N 73.2,61.1 r180 top
R51 "10Ohm" RESC1608X50N 73.2,59.5 r0 top
R52 "10Ohm" RESC1608X50N 73.2,53.8 r0 top
R53 "10Ohm" RESC1608X50N 73.2,52.2 r180 top
R54 "100Ohm" RESC1608X50N 67.175,38.35 r180 top
R55 "100Ohm" RESC1608X50N 67.175,41.85 r180 top
R56 "100Ohm" RESC1608X50N 67.175,40.05 r180 top
R57 "100Ohm" RESC1608X50N 67.175,43.55 r180 top
R58 "100Ohm" RESC1608X50N 67.175,45.35 r180 top
R59 "100Ohm" RESC1608X50N 67.175,48.85 r180 top
R60 "100Ohm" RESC1608X50N 67.185,47.05 r180 top
R61 "100Ohm" RESC1608X50N 67.175,50.55 r180 top
R62 "5.1k" RES_ERA3AEB2491V 31.4,87.5 r180 top
R63 "7.5K RC0603FR-077K5L" RES_ERA3AEB2491V 34.1,87.5 r0 top
R64 "5.1k" RES_ERA3AEB2491V 28.7,87.5 r180 top
R65 "0" RES_ERA3AEB2491V 26,87.5 r180 top
R66 "10Ohm" RESC1608X50N 26.7,31.5 r180 top
R67 "10Ohm" RESC1608X50N 30,31.5 r0 top
R68 "10Ohm" RESC1608X50N 29.9,19.9 r0 top
R69 "10Ohm" RESC1608X50N 26.6,19.9 r0 top
R70 "47Ohm" CAPC1608X90 34.925,79.025 r0 top
R71 "47Ohm" CAPC1608X90 38.35,79.025 r0 top
R72 "47Ohm" CAPC1608X90 35,76.6 r0 top
R73 "47Ohm" CAPC1608X90 38.4,76.6 r0 top
R74 "47Ohm" CAPC1608X90 35,74.7 r0 top
R75 "47Ohm" CAPC1608X90 38.4,74.7 r0 top
R76 "47Ohm" CAPC1608X90 35,72.8 r0 top
R77 "47Ohm" CAPC1608X90 38.4,72.8 r0 top
R78 "47Ohm" CAPC1608X90 58.5,82.9 r270 top
R79 "47Ohm" CAPC1608X90 56.8,82.9 r270 top
R80 "100k RC0603FR-07100KL" RES_ERA3AEB2491V 24,80.2 r180 top
R81 "47Ohm" CAPC1608X90 55.1,82.9 r270 top
R82 "47Ohm" CAPC1608X90 53.4,82.9 r270 top
R83 "47Ohm" CAPC1608X90 51.7,82.9 r270 top
R84 "47Ohm" CAPC1608X90 50,82.9 r270 top
R85 "2M_MCT0603MD2004BP500" CAPC1608X90 85.625,64.6 r270 top
R86 "200k_MCT0603MD2003BP500" CAPC1608X90 86.1,73.2 r90 top
R87 "200k_MCT0603MD2003BP500" CAPC1608X90 87.375,67.2 r0 top
R88 "20k_MCT0603MD2002BP500" CAPC1608X90 87.375,70.55 r0 top
R89 "20k_MCT0603MD2002BP500" CAPC1608X90 87.375,68.875 r0 top
R90 "22Ohm" RES_ERA3AEB2491V 95.475,46.25 r0 top
R91 "22Ohm" RES_ERA3AEB2491V 130.025,52.625 r90 top
R92 "100kOhm" CAPC1608X90 32.175,45.325 r180 top
R93 "100kOhm" CAPC1608X90 32.175,42.785 r180 top
R94 "100kOhm" CAPC1608X90 32.175,40.245 r180 top
R95 "100kOhm" CAPC1608X90 32.175,37.705 r180 top
R96 "22Ohm" RES_ERA3AEB2491V 129.875,31.55 r180 top
R97 "22Ohm" RES_ERA3AEB2491V 47.125,95.425 r180 top
R98 "22Ohm" RES_ERA3AEB2491V 48.075,93.275 r90 top
R99 "22Ohm" RES_ERA3AEB2491V 151.875,52.975 r180 top
R100 "100k" RES_ERA3AEB2491V 27.725,81.15 r180 top
R101 "100k" RES_ERA3AEB2491V -6.775,81.775 r270 top
R102 "18K RC0603JR-0718KL" RES_ERA3AEB2491V 153.646,83.138 r180 bottom
R103 "7.5K RC0603FR-077K5L" RES_ERA3AEB2491V 118.175,84.875 r90 bottom
R104 "2.5K ERA3AEB2491V" RES_ERA3AEB2491V 89.3,85.375 r90 bottom
R105 "2.5K ERA3AEB2491V" RES_ERA3AEB2491V -4.475,90.275 r180 bottom
S1 "PTS647SK38SMTR2LFS" PTS647SK38SMTR2LFS 41.075,84.675 r270 top
SWD "826632-3" TE_826632-3 45.775,90.425 r180 top
U1 "LM1086" TO-263-3 129.95,87.3 r0 top
U2 "LM1086" TO-263-3 101.735,87.3 r0 top
U3 "OPA4388IDR" D0014A-IPC_A 80.266,21.233 r0 top
U4 "DAC80508ZRTER" QFN50P300X300X80-17N#1 99.885,45.975 r90 top
U5 "DAC80508ZRTER" QFN50P300X300X80-17N#1 124.4,53.61 r270 top
U6 "DAC80508ZRTER" QFN50P300X300X80-17N#1 124.435,32.075 r270 top
U7 "DAC80508ZRTER" QFN50P300X300X80-17N#1 145.1,54.26 r270 top
U8 "DAC80508ZRTER" QFN50P300X300X80-17N#2 143.39,31.55 r270 top
U9 "OPA4388IDR" D0014A-IPC_A 80.281,32.624 r0 top
U10 "OPA4388IDR" D0014A-IPC_A 28.5,25.6 r0 top
U11 "SN74LVC8T245DGVR" SOP40P640X120-24N -2,84.4 r180 top
U12 "TPS7A2018PDBVR" SOT95P280X145-5N -5.175,92.925 r0 top
U13 "STM32H743VIT6" LQFP100-14x14mm 52.1,72.3 r90 top
U14 "ADS131A04IPBS" PBS0032A_N 59.375,24.875 r180 top
U15 "ADS131A04IPBS" PBS0032A_N 58.192,40.85 r180 top
U16 "OPA4388IDR" D0014A-IPC_A 80.6,45.383 r0 top
U17 "OPA4388IDR" D0014A-IPC_A 79.2,56.6 r0 top
U18 "ADR4525CRZ-R7" R-8_ADI 99.75,64.075 r270 top
U19 "SN74LVC8T245DGVR" SOP40P640X120-24N 28.2,74.8 r0 top
Y1 "ABM3B-8.000MHZ-B2-T" XTAL_ABM3B-8.000MHZ-B2-T 53.7,57 r90 top

## Footprints (in the part's own frame and the unit in brackets; to place one, negate y for a bottom-side part, rotate by r counter-clockwise, add the part's x,y. Pads: shape width x height; smd on the part's side, far side on the other; paste and mask are expansions set on the pad)
AMPHENOL_12402012E212A [mm]
  rect 0.6x1.14 smd: A1_B12(-3.2,4.75) A4_B9(-2.4,4.75) B1_A12(3.2,4.75) B4_A9(2.4,4.75)
  rect 0.3x1.14 smd: A5(-1.25,4.75) A6(-0.25,4.75) A7(0.25,4.75) A8(1.25,4.75) B5(1.75,4.75) B6(0.75,4.75) B7(-0.75,4.75) B8(-1.75,4.75)
  oval 1.05x2.1 hole 0.6 slot 1.7 at 90 deg: SH1(-4.32,4.18) SH2(4.32,4.18)
  oval 0.9x1.8 hole 0.6 slot 1.4 at 90 deg: SH3(-4.32,0) SH4(4.32,0)
  round 0.65 hole 0.65 unplated: ""(-2.89,3.68) ""(2.89,3.68)
  silkscreen extent -4.47,-2.6 4.47,2.81, body extent -4.49,-2.78 4.44,4.82, height 1.58
CAPC1005X55N [mm]
  rect 0.5x0.6 smd paste+0 mask+0.102: 1(-0.45,0) 2(0.45,0)
  body extent -0.5,-0.25 0.5,0.25, height 0.55
CAPC1608X90 [mm]
  rect 1.1x1 smd: 1(-0.85,0) 2(0.85,0)
  silkscreen extent -0.15,-0.45 0.15,0.45, body extent -0.8,-0.4 0.8,0.4, height 0.9
CAPC2012X140N [mm]
  rrect25% 1.08x1.42 smd: 1(-0.895,0) 2(0.895,0)
  body extent -1,-0.63 1,0.63, height 1.4
CAPC2012X145N [mm]
  rect 1.11x1.47 smd: 1(-0.9,0) 2(0.9,0)
  body extent -1,-0.63 1,0.63, height 1.45
CONN68_5174339_TEC [mil]
  round 52 / inner round 60 / far side round 52 hole 32 paste-99999 mask+0: 1(0,0) 2(50,-75) 3(100,0) 4(150,-75) 5(200,0) 6(250,-75) 7(300,0) 8(350,-75) 9(400,0) 10(450,-75) 11(500,0) 12(550,-75) 13(600,0) 14(650,-75) 15(700,0) 16(750,-75) 17(800,0) 18(850,-75) 19(900,0) 20(950,-75) 21(1000,0) 22(1050,-75) 23(1100,0) 24(1150,-75) 25(1200,0) 26(1250,-75) 27(1300,0) 28(1350,-75) 29(1400,0) 30(1450,-75) 31(1500,0) 32(1550,-75) 33(1600,0) 34(1650,-75) 35(0,-150) 36(50,-225) 37(100,-150) 38(150,-225) 39(200,-150) 40(250,-225) 41(300,-150) 42(350,-225) 43(400,-150) 44(450,-225) 45(500,-150) 46(550,-225) 47(600,-150) 48(650,-225) 49(700,-150) 50(750,-225) 51(800,-150) 52(850,-225) 53(900,-150) 54(950,-225) 55(1000,-150) 56(1050,-225) 57(1100,-150) 58(1150,-225) 59(1200,-150) 60(1250,-225) 61(1300,-150) 62(1350,-225) 63(1400,-150) 64(1450,-225) 65(1500,-150) 66(1550,-225) 67(1600,-150) 68(1650,-225)
  round 126 / inner round 60 / far side round 126 hole 126 unplated paste-99999 mask+0: 69(-314.76,-112.5) 70(1964.76,-112.5)
  silkscreen extent -490,-321 2088,95
D0014A-IPC_A [mm]
  rect 2.474x0.622 smd paste+0 mask+0: 1(-2.416,3.81) 2(-2.416,2.54) 3(-2.416,1.27) 4(-2.416,0) 5(-2.416,-1.27) 6(-2.416,-2.54) 7(-2.416,-3.81) 8(2.416,-3.81) 9(2.416,-2.54) 10(2.416,-1.27) 11(2.416,0) 12(2.416,1.27) 13(2.416,2.54) 14(2.416,3.81)
  silkscreen extent -4.37,-4.33 0.68,4.33
HDR1X2 [mm]
  rect 1.5x1.5 hole 0.9: 1(0,0)
  round 1.5 hole 0.9: 2(2.54,0)
  silkscreen extent -1.27,-1.27 3.81,1.27
HDR1X3 [mm]
  rect 1.5x1.5 hole 0.9: 1(0,0)
  round 1.5 hole 0.9: 2(2.54,0) 3(5.08,0)
  silkscreen extent -1.27,-1.27 6.35,1.27
Inductor [mm]
  rect 3x2 smd: 1(1.881,4.581) 2(1.881,1.381)
  silkscreen extent 0.13,0.13 3.68,5.84
JumperRes [mm]
  rect 0.94x1.02 smd: 1(1.496,0.254) 2(3.076,0.254) 3(4.656,0.254)
KLD-0202_ [mil]
  round 170 hole 140: 1(539.37,0)
  round 150 hole 120: 2(295.28,0) 3(413.39,-196.85)
  silkscreen extent 0,-177 575,177
LQFP100-14x14mm [mil]
  rect 47x12 smd paste+0 mask+0: 1(-305.12,236.22) 2(-305.12,216.54) 3(-305.12,196.85) 4(-305.12,177.17) 5(-305.12,157.48) 6(-305.12,137.8) 7(-305.12,118.11) 8(-305.12,98.43) 9(-305.12,78.74) 10(-305.12,59.06) 11(-305.12,39.37) 12(-305.12,19.69) 13(-305.12,0) 14(-305.12,-19.68) 15(-305.12,-39.37) 16(-305.12,-59.06) 17(-305.12,-78.74) 18(-305.12,-98.43) 19(-305.12,-118.11) 20(-305.12,-137.8) 21(-305.12,-157.48) 22(-305.12,-177.17) 23(-305.12,-196.85) 24(-305.12,-216.54) 25(-305.12,-236.22) 51(305.12,-236.22) 52(305.12,-216.54) 53(305.12,-196.85) 54(305.12,-177.17) 55(305.12,-157.48) 56(305.12,-137.8) 57(305.12,-118.11) 58(305.12,-98.43) 59(305.12,-78.74) 60(305.12,-59.06) 61(305.12,-39.37) 62(305.12,-19.68) 63(305.12,0) 64(305.12,19.68) 65(305.12,39.37) 66(305.12,59.06) 67(305.12,78.74) 68(305.12,98.43) 69(305.12,118.11) 70(305.12,137.8) 71(305.12,157.48) 72(305.12,177.17) 73(305.12,196.85) 74(305.12,216.54) 75(305.12,236.22)
  rect 12x47 smd paste+0 mask+0: 26(-236.22,-305.12) 27(-216.54,-305.12) 28(-196.85,-305.12) 29(-177.17,-305.12) 30(-157.48,-305.12) 31(-137.8,-305.12) 32(-118.11,-305.12) 33(-98.43,-305.12) 34(-78.74,-305.12) 35(-59.06,-305.12) 36(-39.37,-305.12) 37(-19.68,-305.12) 38(0,-305.12) 39(19.69,-305.12) 40(39.37,-305.12) 41(59.06,-305.12) 42(78.74,-305.12) 43(98.43,-305.12) 44(118.11,-305.12) 45(137.8,-305.12) 46(157.48,-305.12) 47(177.17,-305.12) 48(196.85,-305.12) 49(216.54,-305.12) 50(236.22,-305.12) 76(236.22,305.12) 77(216.54,305.12) 78(196.85,305.12) 79(177.17,305.12) 80(157.48,305.12) 81(137.8,305.12) 82(118.11,305.12) 83(98.43,305.12) 84(78.74,305.12) 85(59.06,305.12) 86(39.37,305.12) 87(19.69,305.12) 88(0,305.12) 89(-19.68,305.12) 90(-39.37,305.12) 91(-59.06,305.12) 92(-78.74,305.12) 93(-98.43,305.12) 94(-118.11,305.12) 95(-137.8,305.12) 96(-157.48,305.12) 97(-177.17,305.12) 98(-196.85,305.12) 99(-216.54,305.12) 100(-236.22,305.12)
  silkscreen extent -349,-349 349,349, body extent -315,-315 315,315, height 63
PBS0032A_N [mm]
  oval 1.4x0.3 smd paste+0 mask+0.051: 1(-3.2,1.75) 2(-3.2,1.25) 3(-3.2,0.75) 4(-3.2,0.25) 5(-3.2,-0.25) 6(-3.2,-0.75) 7(-3.2,-1.25) 8(-3.2,-1.75) 17(3.2,-1.75) 18(3.2,-1.25) 19(3.2,-0.75) 20(3.2,-0.25) 21(3.2,0.25) 22(3.2,0.75) 23(3.2,1.25) 24(3.2,1.75)
  oval 0.3x1.4 smd paste+0 mask+0.051: 9(-1.75,-3.2) 10(-1.25,-3.2) 11(-0.75,-3.2) 12(-0.25,-3.2) 13(0.25,-3.2) 14(0.75,-3.2) 15(1.25,-3.2) 16(1.75,-3.2) 25(1.75,3.2) 26(1.25,3.2) 27(0.75,3.2) 28(0.25,3.2) 29(-0.25,3.2) 30(-0.75,3.2) 31(-1.25,3.2) 32(-1.75,3.2)
  silkscreen extent -3.6,-2.53 2.53,2.53
PolarizedCap [mm]
  rect 3x2 smd: 1(1.5,4.2) 2(1.5,1)
  silkscreen extent -0.76,-0.25 3.81,5.46
POT4MM-2 [mm]
  rect 2x1.3 smd: 1(-2,1.15) 3(-2,-1.15)
  rect 2x2 smd: 2(2,0)
  silkscreen extent -2.5,-2.5 2.5,2.5
PTS647SK38SMTR2LFS [mm]
  rect 1.55x1 smd: 1(-2.625,1.6) 2(2.625,1.6) 3(-2.625,-1.6) 4(2.625,-1.6)
  silkscreen extent -4.05,-2.25 2.25,2.25, body extent -3.25,-2.25 3.25,2.25, height 3.8
QFN50P300X300X80-17N#1 [mm]
  rrect25% 0.88x0.26 smd: 1(-1.435,0.75) 2(-1.435,0.25) 3(-1.435,-0.25) 4(-1.435,-0.75) 9(1.435,-0.75) 10(1.435,-0.25) 11(1.435,0.25) 12(1.435,0.75)
  rrect25% 0.26x0.88 smd: 5(-0.75,-1.435) 6(-0.25,-1.435) 7(0.25,-1.435) 8(0.75,-1.435) 13(0.75,1.435) 14(0.25,1.435) 15(-0.25,1.435) 16(-0.75,1.435)
  rect 0.8x0.8 smd paste-0.15: 17(0,0)
  round 0.4 hole 0.2 mask+0: 18(0,0)
  silkscreen extent -2.63,-1.5 1.5,1.5, body extent -1.5,-1.5 1.5,1.5, height 0.8
QFN50P300X300X80-17N#2 [mm]
  rrect25% 0.88x0.26 smd: 1(-1.435,0.75) 2(-1.435,0.25) 3(-1.435,-0.25) 4(-1.435,-0.75) 9(1.435,-0.75) 10(1.435,-0.25) 11(1.435,0.25) 12(1.435,0.75)
  rrect25% 0.26x0.88 smd: 5(-0.75,-1.435) 6(-0.25,-1.435) 7(0.25,-1.435) 8(0.75,-1.435) 13(0.75,1.435) 14(0.25,1.435) 15(-0.25,1.435) 16(-0.75,1.435)
  rect 0.8x0.8 smd paste-0.15: 17(0,0)
  round 0.4 hole 0.2 mask+0: ""(0,0)
  silkscreen extent -2.63,-1.5 1.5,1.5, body extent -1.5,-1.5 1.5,1.5, height 0.8
R-8_ADI [mil]
  rect 78x22 smd paste+0 mask+0: 1(-97,75) 2(-97,25) 3(-97,-25) 4(-97,-75) 5(97,-75) 6(97,-25) 7(97,25) 8(97,75)
  silkscreen extent -84,-104 84,104, body extent -122,-99 122,99, height 69
RES_ERA3AEB2491V [mm]
  rect 0.65x0.9 smd: 1(-0.725,0) 2(0.725,0)
  silkscreen extent -0.08,-0.4 0.08,0.4
RESC1608X50N [mm]
  rect 0.94x1.02 smd: 1(-0.79,0) 2(0.79,0)
Resistor [mm]
  rect 3x2 smd: 1(1.881,4.581) 2(1.881,1.381)
  silkscreen extent 0.13,0.13 3.68,5.84
SOP40P640X120-24N [mm]
  rrect25% 1.57x0.24 smd: 1(-2.87,2.2) 2(-2.87,1.8) 3(-2.87,1.4) 4(-2.87,1) 5(-2.87,0.6) 6(-2.87,0.2) 7(-2.87,-0.2) 8(-2.87,-0.6) 9(-2.87,-1) 10(-2.87,-1.4) 11(-2.87,-1.8) 12(-2.87,-2.2) 13(2.87,-2.2) 14(2.87,-1.8) 15(2.87,-1.4) 16(2.87,-1) 17(2.87,-0.6) 18(2.87,-0.2) 19(2.87,0.2) 20(2.87,0.6) 21(2.87,1) 22(2.87,1.4) 23(2.87,1.8) 24(2.87,2.2)
  silkscreen extent -4.54,-2.64 2.2,2.64
SOT23-6L_STM [mil]
  rect 38.5x22 smd paste+0 mask+0: 1(-53.75,37.4) 2(-53.75,0) 3(-53.75,-37.4) 4(53.75,-37.4) 5(53.75,0) 6(53.75,37.4)
  silkscreen extent -40,-65 40,65, body extent -59,-60 59,60, height 57
SOT95P237X111-3N [mm]
  rrect25% 1.23x0.6 smd paste+0 mask+0.102: 1(-1.06,0.95) 2(-1.06,-0.95) 3(1.06,0)
  silkscreen extent -2.35,-1.45 0.65,1.45
SOT95P280X145-5N [mm]
  rrect15% 1.21x0.59 smd: 1(-1.255,0.95) 2(-1.255,0) 3(-1.255,-0.95) 4(1.255,-0.95) 5(1.255,0.95)
  silkscreen extent -2.68,-1.45 0.8,1.45
TE_826632-3 [mm]
  rect 1.35x1.35 / inner round 1.35 / far side rect 1.35x1.35 hole 1: 1(0,0)
  round 1.35 hole 1: 2(0,-2.54) 3(2.54,0) 4(2.54,-2.54) 5(5.08,0) 6(5.08,-2.54)
  silkscreen extent -2.02,-3.77 6.35,1.23
TO-263-3 [mm]
  rect 1.05x2.1 smd: 1(-2.54,-4.225) 2(0,-4.225) 3(2.54,-4.225)
  rect 10.5x10.3 smd: 4(0,4.225)
  silkscreen extent -5.55,-5.85 5.55,9.27
VQFN20_3P5X3P5_TEX [mil]
  rect 32x10 smd paste+0 mask+0: 1(-68,39.37) 2(-68,19.69) 3(-68,0) 4(-68,-19.69) 5(-68,-39.37) 11(68,-39.37) 12(68,-19.69) 13(68,0) 14(68,19.69) 15(68,39.37)
  rect 10x32 smd paste+0 mask+0: 6(-39.37,-68) 7(-19.68,-68) 8(0,-68) 9(19.69,-68) 10(39.37,-68) 16(39.37,68) 17(19.69,68) 18(0,68) 19(-19.68,68) 20(-39.37,68)
  rect 79x79 smd paste+0 mask+0: 21(0,0)
  silkscreen extent -74,-104 74,104, body extent -72,-72 72,72, height 39
XTAL_ABM3B-8.000MHZ-B2-T [mm]
  rect 1.2x1.8 smd: 1(-1.2,2) 2(-1.2,-2) 3(1.2,-2) 4(1.2,2)
  silkscreen extent -2.65,-2.5 1.6,2.5, body extent -1.58,-2.5 1.6,2.5, height 1.1
ZIF40 [mil]
  rect 48x48 hole 32: 1(0,0)
  round 48 hole 32: 2(600,0) 3(0,-100) 4(600,-100) 5(0,-200) 6(600,-200) 7(0,-300) 8(600,-300) 9(0,-400) 10(600,-400) 11(0,-500) 12(600,-500) 13(0,-600) 14(600,-600) 15(0,-700) 16(600,-700) 17(0,-800) 18(600,-800) 19(0,-900) 20(600,-900) 21(0,-1000) 22(600,-1000) 23(0,-1100) 24(600,-1100) 25(0,-1200) 26(600,-1200) 27(0,-1300) 28(600,-1300) 29(0,-1400) 30(600,-1400) 31(0,-1500) 32(600,-1500) 33(0,-1600) 34(600,-1600) 35(0,-1700) 36(600,-1700) 37(0,-1800) 38(600,-1800) 39(0,-1900) 40(600,-1900)
  round 65 hole 65: a(300,335) b(300,-2080)
  silkscreen extent -150,-2168 750,858

## Part data
B0: "Cap Header, Vertical /M2.5 AMPLIMITE 050 Series II", Package Information="Latest Revision: May-1991", Package Reference=050DSUB1.27-2V68D, Datasheet=(23-May-91), Drill Size="Corresponds to nominal value.", Gender="Plug Header", Note="Series II", Orientation=Vertical, PCB Layout="Complies with manufacturer's recommendation.", Positions=68, Published=17-Jul-2002, Publisher="Altium Limited", Revision="21-Nov-2002: PCB Footprint sequence changed."
C0 C1 C2 C3 C4 C5 C6 C7 C9 C11 C60 C114: library part "Cap Pol3", "Polarized Capacitor (Surface Mount)", Published=8-Jun-2000, Publisher="Altium Limited", Revision="July-2002: Re-released for DXP Platform."
C8 C10 C12 C13 C14 C19 C57 C115 C116: library part Cap, "Capacitor", Published=8-Jun-2000, Publisher="Altium Limited", Revision="July-2002: Re-released for DXP Platform."
C15 C20 C22 C23 C32 C42 C51 C53 C54 C61 C62 C63 C64 C93 C94 C95 C102 C103 C104 C105 C106 C107 C108 C109 C111 C112 C118 C121 C122 C127 C128 C129: library part CC0603KRX7R7BB105, "No Description Available", Manufacturer_Name=Yageo, Copyright="Copyright (C) 2025 Ultra Librarian. All rights reserved.", Manufacturer_Part_Number=CC0603KRX7R7BB105, Supplier 1=Avnet, Supplier Part Number 1=CC0603KRX7R7BB105
C16 C18 C21 C25 C27 C29 C31 C33 C35 C37 C39 C41 C43 C45 C47 C49 C50 C52 C56 C76 C77 C79 C92 C96 C97 C98 C99 C100 C101 C110 C117 C119: library part CC0603KRX7R7BB104, "No Description Available", Manufacturer_Name=Yageo, Copyright="Copyright (C) 2025 Ultra Librarian. All rights reserved.", Manufacturer_Part_Number=CC0603KRX7R7BB104, Supplier 1=Avnet, Supplier Part Number 1=CC0603KRX7R7BB104
C17 C24 C26 C28 C30 C34 C36 C38 C40 C44 C46 C48 C55 C75 C78 C113: library part CL21B106KOQNNNE, "No Description Available", Manufacturer_Name=Samsung, Supplier Part Number 1=1276-2872-6-ND, Copyright="Copyright (C) 2025 Ultra Librarian. All rights reserved.", Manufacturer_Part_Number=CL21B106KOQNNNE, Supplier 1=DigiKey
C58 C59 C65 C66 C67 C68 C69 C70 C71 C72 C73 C74 C80 C81 C82 C83 C84 C85 C86 C87 C88 C89 C90 C91: library part GRM21BR60J107ME15L, "100 ÂµF Â±20% 6.3V Ceramic Capacitor X5R 0805 (2012 Metric)", Package="2012 Murata", Check_prices=https://www.snapeda.com/parts/GRM21BR60J107ME15L/Murata/view-part/?ref=eda, MF=Murata, MP=GRM21BR60J107ME15L, SnapEDA_Link=https://www.snapeda.com/parts/GRM21BR60J107ME15L/Murata/view-part/?ref=snap
C120 C123 C124 C125 C126: "CBR-SMD RF C0G, Ceramic, 22 pF, 1%, 50 VDC, C0G, SMD, Fixed, RF, Ultra High Q, Low ESR, Class I, 0402", Manufacturer_Name=Kemet, Copyright="Copyright (C) 2025 Ultra Librarian. All rights reserved.", Manufacturer_Part_Number=CBR04C220F5GAC
CR1: "ESD Protection for USB 2.0 High Speed", Manufacturer_Name=STMicroelectronics, Copyright="Copyright (C) 2025 Ultra Librarian. All rights reserved.", Manufacturer_Part_Number=USBLC6-2SC6, RefDes=RefDes, Type=Type
HD0 HD1 HD2 HD3: "Header, 20-Pin, Dual row", Publisher="Altium Limited", Revision="17-Jul-2002: Re-released for DXP Platform."
IC1: "High-speed (40 MHz) high-precision (60 ÂµV) low-noise op amp with integrated gain switches 20-VQFN -40 to 125", Manufacturer_Name="Texas Instruments", Copyright="Copyright (C) 2026 Ultra Librarian. All rights reserved.", Manufacturer_Part_Number=OPA3S328RGRR, RefDes=RefDes, Type=Type
J1: "USB2.0, Type C, Top mount, CH 1.68mm, Dual Row SMT", Package=None, Availability="In Stock", Check_prices=https://www.snapeda.com/parts/12402012E212A/Amphenol/view-part/?ref=eda, MF="Amphenol ICC (Commercial Products)", MP=12402012E212A, Price=None, Purchase-URL=https://pricing.snapeda.com/search/part/12402012E212A/?ref=eda, SnapEDA_Link=https://www.snapeda.com/parts/12402012E212A/Amphenol/view-part/?ref=snap
JGND SWD: "PCB Breakaway Header, 2.54mm, 3 Way 2 Row, Gold, AMPMODU Headers Series", Package=None, Check_prices=https://www.snapeda.com/parts/826632-3/TE+Connectivity+AMP+Connectors/view-part/?ref=eda, EU_RoHS_Compliance=Compliant, MF="TE Connectivity", MP=826632-3, SnapEDA_Link=https://www.snapeda.com/parts/826632-3/TE+Connectivity+AMP+Connectors/view-part/?ref=snap
JGND2 JP6 JP7 JP8 JP10 JP11 JP12 JP13 JP14 JP15 JP16 JP17 JP18 JP20 JP21 JP22 JP23 JP24 JP25 JP26 JP27 JP30 JP34 JP35 JP36 JP37 JP_VLT JP_VLT1: library part JP3_1, "Jumper"
JP0 JP1 JP2 JP4 JP5 JP9 JP19 JP28 JP29 JP31 JP32 JP33: library part JP2, "Jumper"
JP_DAC_2 JP_DAC_3 JP_DAC_4 JP_DVDD: library part JP3, "Jumper"
JPW0: library part PWR2.5, "Low Voltage Power Supply Connector", Datasheet="Latest Revision: 09-May-2002", Published=17-Dec-2003, Publisher="Altium Limited"
L2 L3 L4 L5 L6: library part Inductor, Published=8-Jun-2000, Publisher="Altium Limited", Revision="July-2002: Re-released for DXP Platform."
LED1 LED2 LED3 LED4 LED5 LED6 LED7 LED8 LED9: "Description", Manufacturer_Name="ams OSRAM", Copyright="Copyright (C) 2025 Ultra Librarian. All rights reserved.", Manufacturer_Part_Number="LG L29K-F2J1-24-Z"
Q1 U4 U5 U6 U7 U8 U11 U12 U19: Package=None, Availability=Unavailable, Price=None
  Q1: MF="{'manufacturer': u'onsemi'}", MP=BSS138LT3G
  U4 U5 U6 U7 U8: MP=DAC80508ZRTER
  U11 U19: MP=SN74LVC8T245DGVR
  U12: MF="{'manufacturer': u'Texas Instruments'}", MP=TPS7A2018PDBVR
R1 R3: library part Res3, "Resistor", Published=8-Jun-2000, Publisher="Altium Limited", Revision="July-2002: Re-released for DXP Platform."
R2 R4: library part POT_, "Potentiometer", Published=8-Jun-2000, Publisher="Altium Limited", Revision="July-2002: Re-released for DXP Platform.", Set Position=0.5
R5 R6 R7 R8 R9 R10 R27 R28 R45 R62 R63 R64 R65 R70 R71 R72 R73 R74 R75 R76 R77 R78 R79 R80 R81 R82 R83 R84 R90 R91 R92 R93 R94 R95 R96 R97 R98 R99 R100 R101 R102 R103 R104 R105: library part ERA3AEB2491V, Package=None, Availability=Unavailable, MP=ERA3AEB2491V, Price=None
R11 R12 R13 R14 R15 R16 R17 R18 R19 R20 R21 R22 R23 R24 R25 R26 R29 R30 R31 R32 R33 R34 R35 R36 R37 R38 R39 R40 R41 R42 R43 R44 R46 R47 R48 R49 R50 R51 R52 R53 R54 R55 R56 R57 R58 R59 R60 R61 R66 R67 R68 R69: library part RG1608P-221-B-T5, "RG1608P-221-B-T5", Package=None, Availability=Unavailable, MP=RG1608P-221-B-T5, Price=None
R85 R86 R87 R88 R89: library part MCT0603MD2004BP500, "MCT 0603-25 0.1% AT P5 2M0", Manufacturer_Name=Vishay, Copyright="Copyright (C) 2025 Ultra Librarian. All rights reserved.", Manufacturer_Part_Number=MCT0603MD2004BP500
S1: "Tactile Switch SPST-NO Top Actuated Surface Mount", Package=None, Check_prices=https://www.snapeda.com/parts/PTS%20647%20SK38%20SMTR2%20LFS/C%2526K/view-part/?ref=eda, MF=C&K, MP="PTS 647 SK38 SMTR2 LFS", SnapEDA_Link=https://www.snapeda.com/parts/PTS%20647%20SK38%20SMTR2%20LFS/C%2526K/view-part/?ref=snap
U3 U9 U10 U16 U17: "Quad, 10-MHz, CMOS, zero-drift, zero-crossover, true RRIO precision operational amplifier 14-SOIC -40 to 125", Manufacturer_Name="Texas Instruments", Copyright="Copyright (C) 2026 Ultra Librarian. All rights reserved.", Datasheet=https://www.ti.com/lit/gpn/opa4388, Manufacturer_Part_Number=OPA4388IDR, RefDes=RefDes, Type=TYPE
U13: "High-performance and DSP with DP-FPU, Arm Cortex-M7 MCU with 2MBytes of Flash memory, 1MB RAM, 480 MHz CPU, Art Accelerator, L1 cache, external memory interface, large set of peripherals", Manufacturer_Name=STMicroelectronics, Copyright="Copyright (C) 2025 Ultra Librarian. All rights reserved.", Manufacturer_Part_Number=STM32H743VIT6, RefDes=RefDes, Type=Type
U14 U15: "24-bit 128-kSPS 4-channel simultaneous-sampling delta-sigma ADC 32-TQFP -40 to 125", Manufacturer_Name="Texas Instruments", Copyright="Copyright (C) 2025 Ultra Librarian. All rights reserved.", Manufacturer_Part_Number=ADS131A04IPBS, RefDes=RefDes, Type=TYPE
U18: "Ultra-Low-Noise, High-Accuracy 2.5V Voltage Reference", Manufacturer_Name="Analog Devices Inc", Copyright="Copyright (C) 2025 Ultra Librarian. All rights reserved.", Datasheet=https://www.analog.com/media/en/technical-documentation/data-sheets/ADR4520_4525_4530_4533_4540_4550.pdf, Manufacturer_Part_Number=ADR4525CRZ-R7, RefDes=RefDes, Type=Type
Y1: "8 MHz Â±20ppm Crystal 18pF 200 Ohms 4-SMD, No Lead", Package="SMD-4 Abracon LLC", Check_prices=https://www.snapeda.com/parts/ABM3B-8.000MHZ-B2-T/Abracon/view-part/?ref=eda, MF=Abracon, MP=ABM3B-8.000MHZ-B2-T, SnapEDA_Link=https://www.snapeda.com/parts/ABM3B-8.000MHZ-B2-T/Abracon/view-part/?ref=snap

## Free pads (board coordinates)
  round 3.81 hole 3.81: 1(152.025,18.45) 2(152.025,93.15) 3(-13.945,93.15) 4(-13.645,18.45)
  round 7.62 on Top Overlay: 1(152.025,18.45) 2(152.025,93.15) 3(-13.945,93.15) 4(-13.645,18.45)

## Via types
v1: diameter 1.27, hole 0.711, Top Layer to Bottom Layer, 153 vias

## Nets (pads, with @x,y where several pads share a name; then routed paths per layer and width w, separated by ;. In a path a pad name is that pad's centre, name@x,y a point inside that pad or via, vN(x,y) a via of type N, cw(c..) or ccw(c..) an arc to the next point about the centre after c; other vN are vias at no path point)
-INA: C123.2 C125.2 HD2.12 IC1.18 R86.2 R88.2 | length 30.3
  Top Layer w0.25: IC1.18@83,70.5 83,72.454 82.998,72.456 82.998,74.404 83.144,74.55 85.579,74.55 85.654,74.475 85.725,74.475 86.1,74.1 R86.2@86.1,74.05 ; R86.2@86.1,74 86.475,73.625 86.825,73.625 87.5,72.95 C123.2@87.55,72.95 C125.2@88.75,72.95 88.8,72.95 89.302,72.448 89.302,71.577 88.275,70.55 R88.2@88.225,70.55 90.813,70.55 93.375,67.988 93.375,59.44 HD2.12@91.96,58.025
-INB: C120.2 C124.2 C126.2 HD2.10 IC1.8 R85.2 R87.2 R89.2 | length 31.8
  Top Layer w0.25: v1(81.425,65.488) 81.62,65.683 82.296,65.683 83,66.388 IC1.8@83,67.046 ; R85.2@85.625,63.75 85.625,63.8 86.525,64.7 86.95,64.7 C120.2@87.075,64.825 C124.2@88.3,64.825 C124.2@88.35,64.825 ; R87.2@88.225,67.2 R89.2@88.225,68.875 88.5,68.6 C126.2@89.725,68.6 89.725,66.2 C124.2@88.35,64.825 ; HD2.10@91.96,60.565 91.775,60.75 91.775,61.4 C124.2@88.35,64.825
  Bottom Layer w0.25: v1(81.425,65.488) 86.326,60.587 91.938,60.587 HD2.10@91.96,60.565
ADC1_CS: U13.98 U14.23 | length 50.6
  Top Layer w0.25: U13.98@44.35,67.3 44.377,67.273 44.983,67.273 45.199,67.057 45.199,31.801 53.365,23.635 56.165,23.635 U14.23@56.175,23.625
ADC1_DRDY: U13.1 U14.19 | length 49.1
  Top Layer w0.25: U13.1@46.1,64.55 46.1,65.675 v1(46.625,66.2) ; v1(54.55,27.15) 54.745,26.955 54.745,26.355 55.465,25.635 56.165,25.635 U14.19@56.175,25.625
  Bottom Layer w0.25: v1(46.625,66.2) 46.625,31.65 51.425,26.85 53.974,26.85 54.274,27.15 v1(54.55,27.15)
ADC2_CS: U13.97 U15.23 | length 35.8
  Top Layer w0.25: U13.97@44.35,67.8 45.341,67.8 45.6,67.541 45.6,44.55 50.55,39.6 U15.23@54.992,39.6
ADC2_DOUT: JP30.2 R28.1 U15.21 | length 9.1
  Top Layer w0.25: JP30.2@51.975,46.55 52.175,46.35 53.325,46.35 53.65,46.025 R28.1@53.775,46.025 ; R28.1@53.875,46.025 54.075,45.825 54.075,44.635 55.944,42.767 55.944,40.933 55.62,40.61 55.001,40.61 U15.21@54.992,40.6
ADC2_DRDY: U13.2 U15.19 | length 28.1
  Top Layer w0.25: U13.2@46.6,64.55 46.6,63.423 45.994,62.817 45.994,48.548 52.942,41.6 U15.19@54.992,41.6
ADC2_SDOUT: JP30.3 U13.4 | length 22.3
  Top Layer w0.25: U13.4@47.6,64.55 47.6,63.356 46.748,62.504 46.748,49.777 51.26,45.265 51.68,45.265 JP30.3@51.975,44.97
ADC_MCLK: U13.67 U14.25 U15.25 | length 65.4
  Top Layer w0.25: U13.67@50.1,80.05 50.127,80.023 50.127,75.598 v1(50.25,75.475) ; v1(54.85,37.5) 56.419,37.5 56.442,37.523 U15.25@56.442,37.65 ; v1(55.05,21.675) U14.25@57.625,21.675
  Bottom Layer w0.25: v1(50.25,75.475) 50.3,75.475 54.863,70.912 54.863,54.117 v1@54.863,37.513 ; v1(54.85,37.5) 55.825,36.525 55.825,22.719 55.05,21.944 v1(55.05,21.675)
ADC_RESET: U13.3 U14.17 U15.17 | length 47.9
  Top Layer w0.25: U13.3@47.1,64.55 47.1,63.39 46.371,62.661 46.371,48.854 52.625,42.6 53.2,42.6 ; v1(53.2,43.7) 53.2,42.6 ; v1(54.2,29.025) 55.75,27.475 55.75,26.648 55.773,26.625 U14.17@56.175,26.625 ; U15.17@54.992,42.6 53.2,42.6
  Bottom Layer w0.25: v1(53.2,43.7) 53.2,39.95 52.3,39.05 52.3,30.4 53.48,29.22 54.005,29.22 v1(54.2,29.025)